# Altium PCB BASE.PcbDoc (part 1 of 5)
Units mil, origin at the board's own origin, x right, y up, seen from the top; angles counter-clockwise.
Board outline 4330.71 x 3937.01 mil, 6 copper layers (Top, GND1, SIG1, PWR, GND2, Bottom), stack 32.112 mil thick; 57 components, 250 nets, 665 pads, 350 vias.
Unrouted connection lines stored in the file: 2.
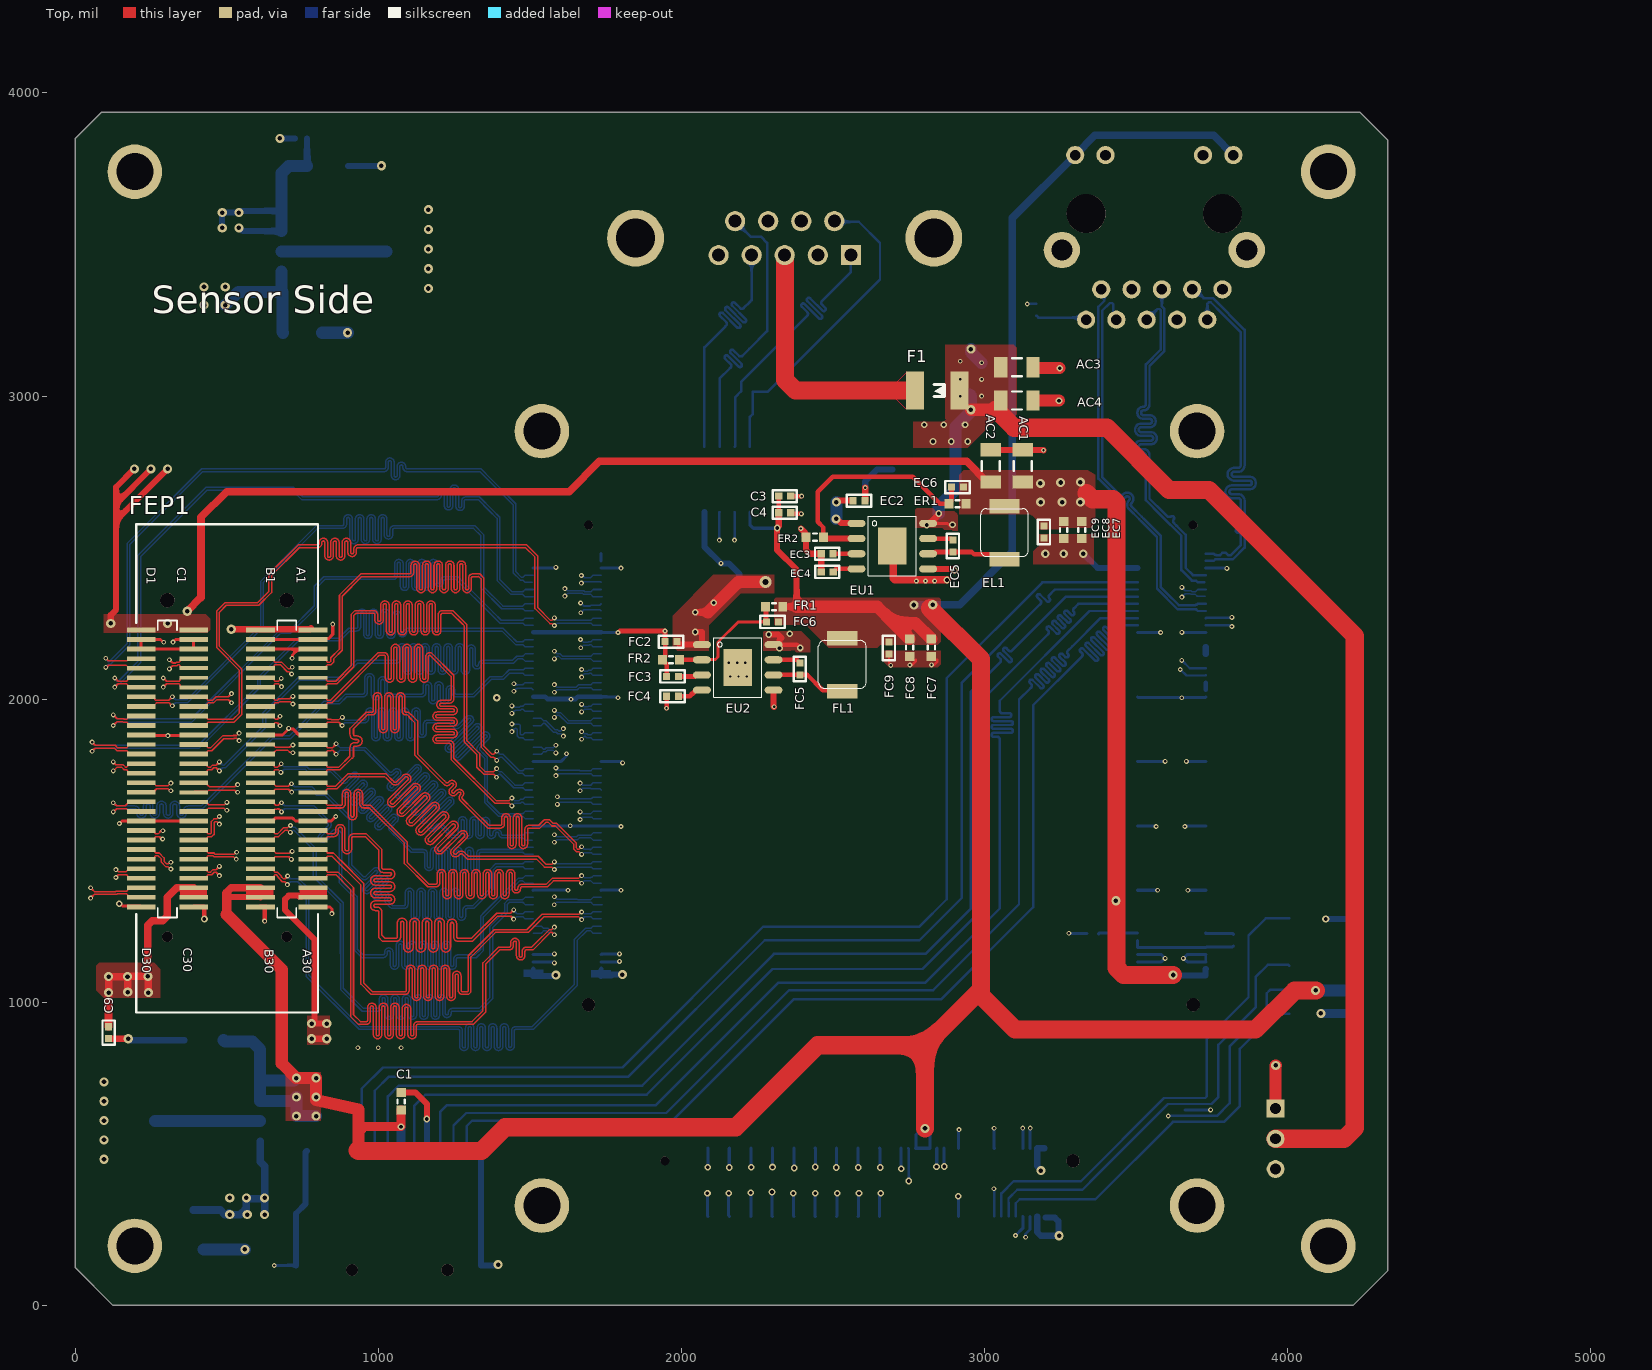
[diagram p0: Top view]
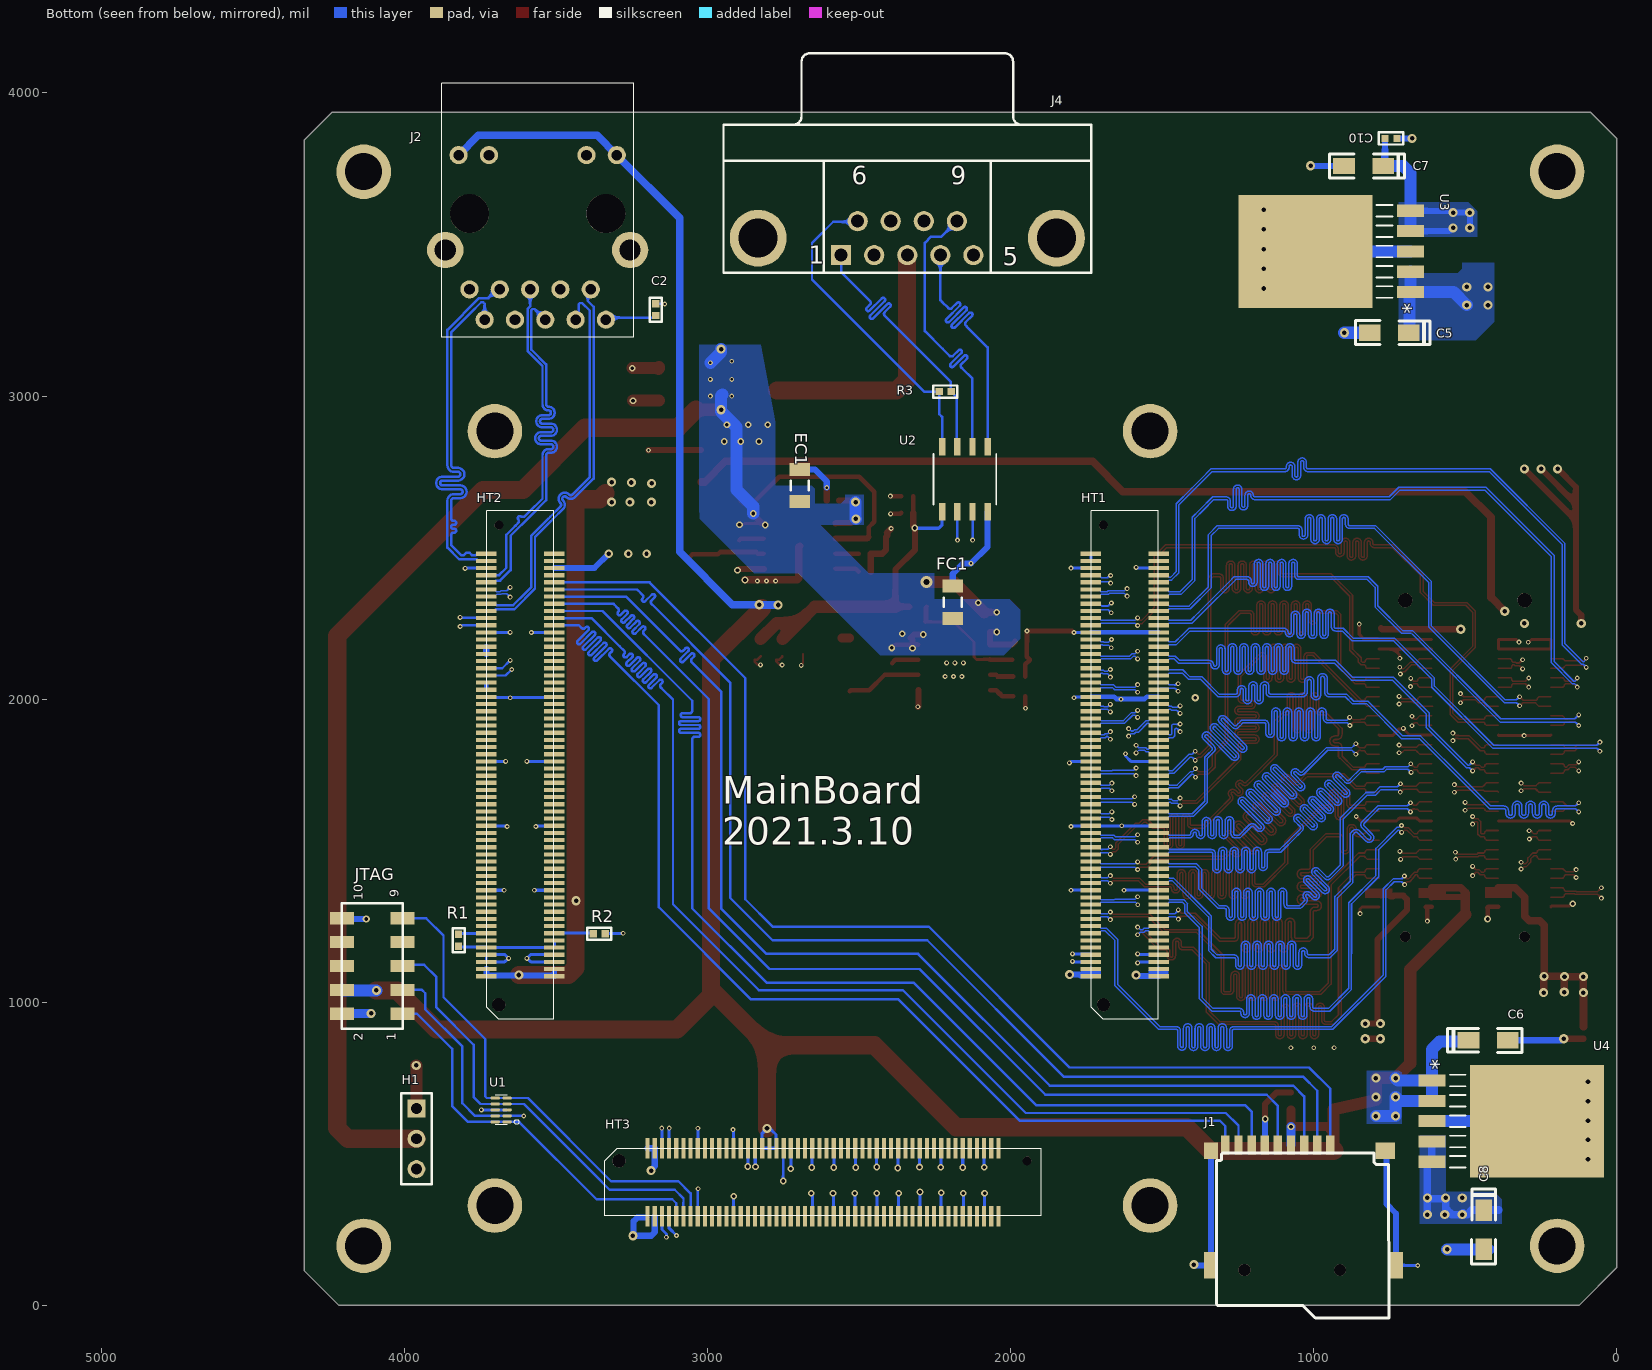
[diagram p1: Bottom view, seen from below]
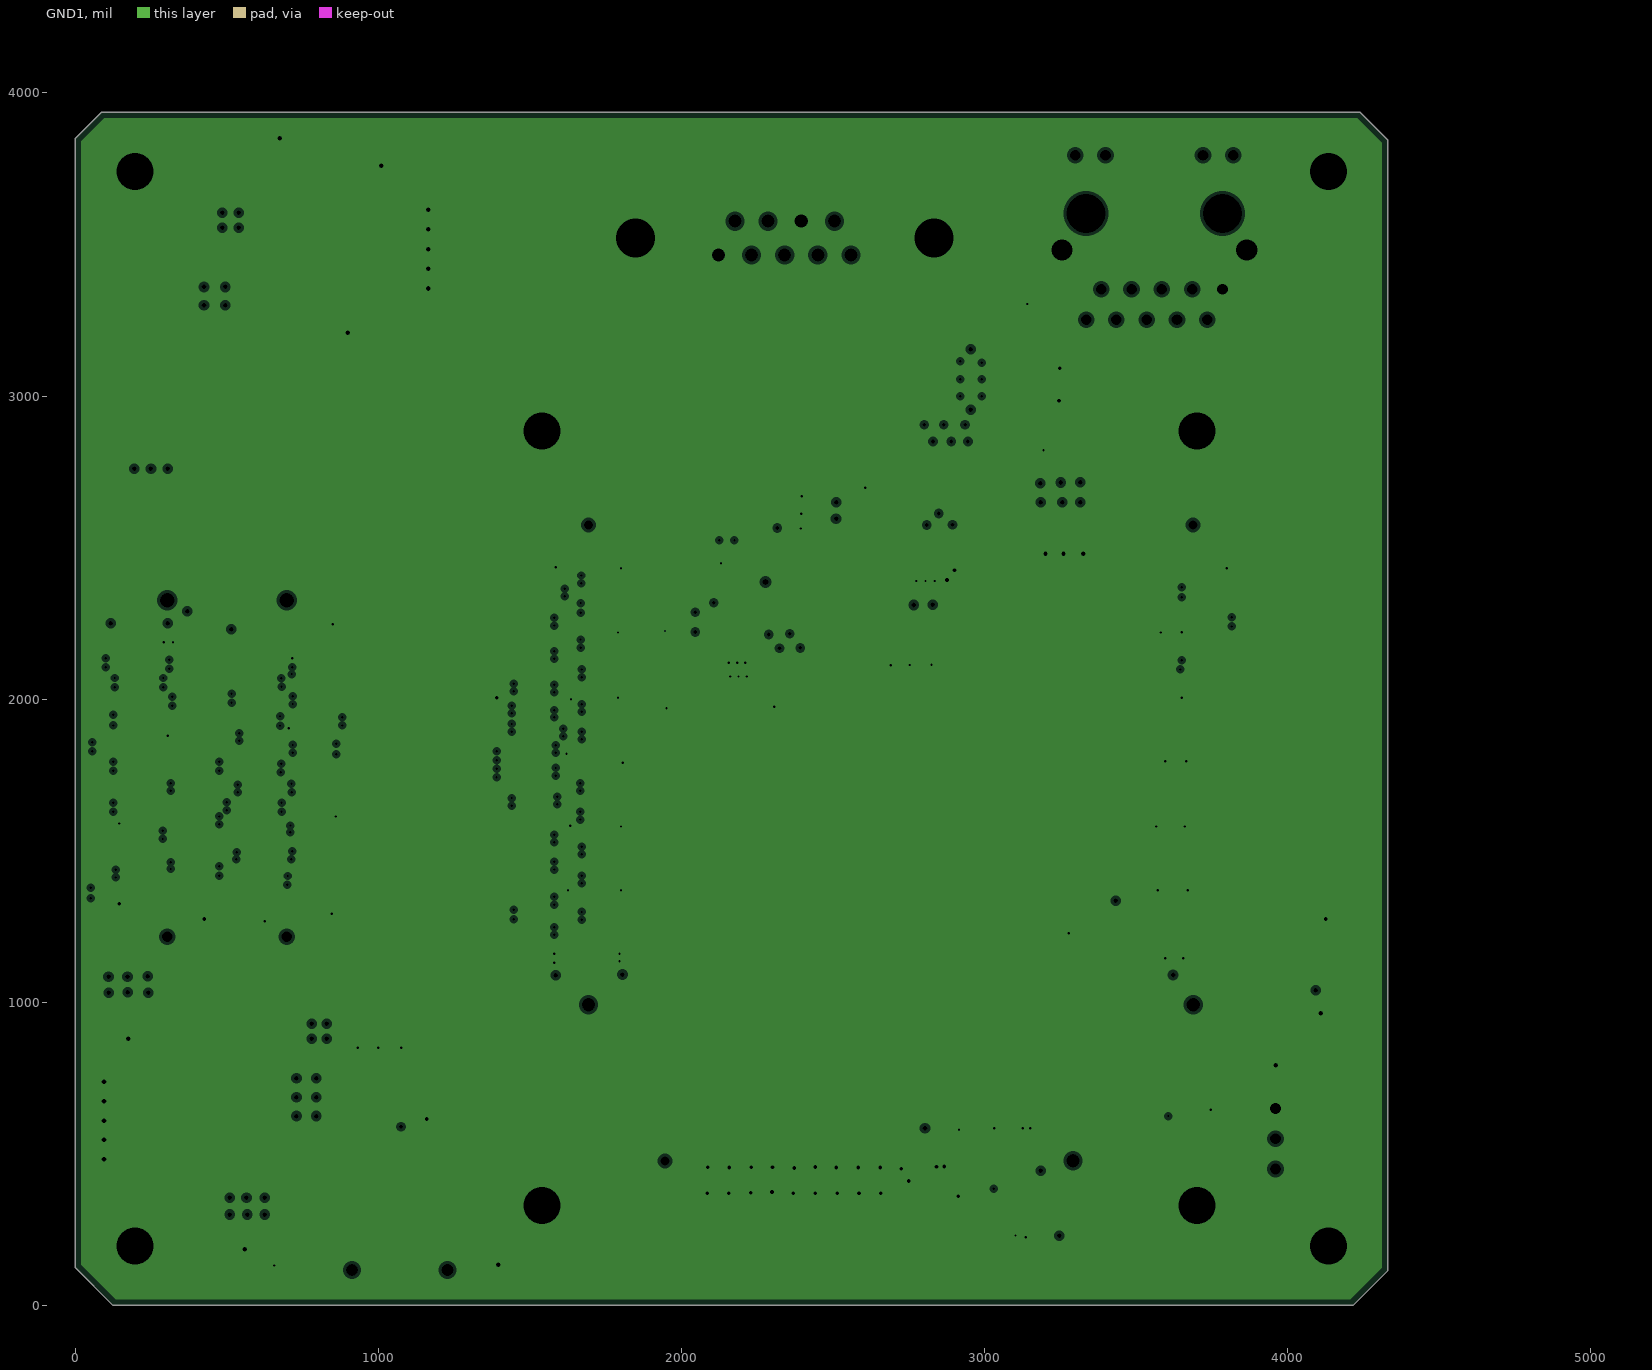
[diagram p2: GND1, clearances drawn from the general rule]
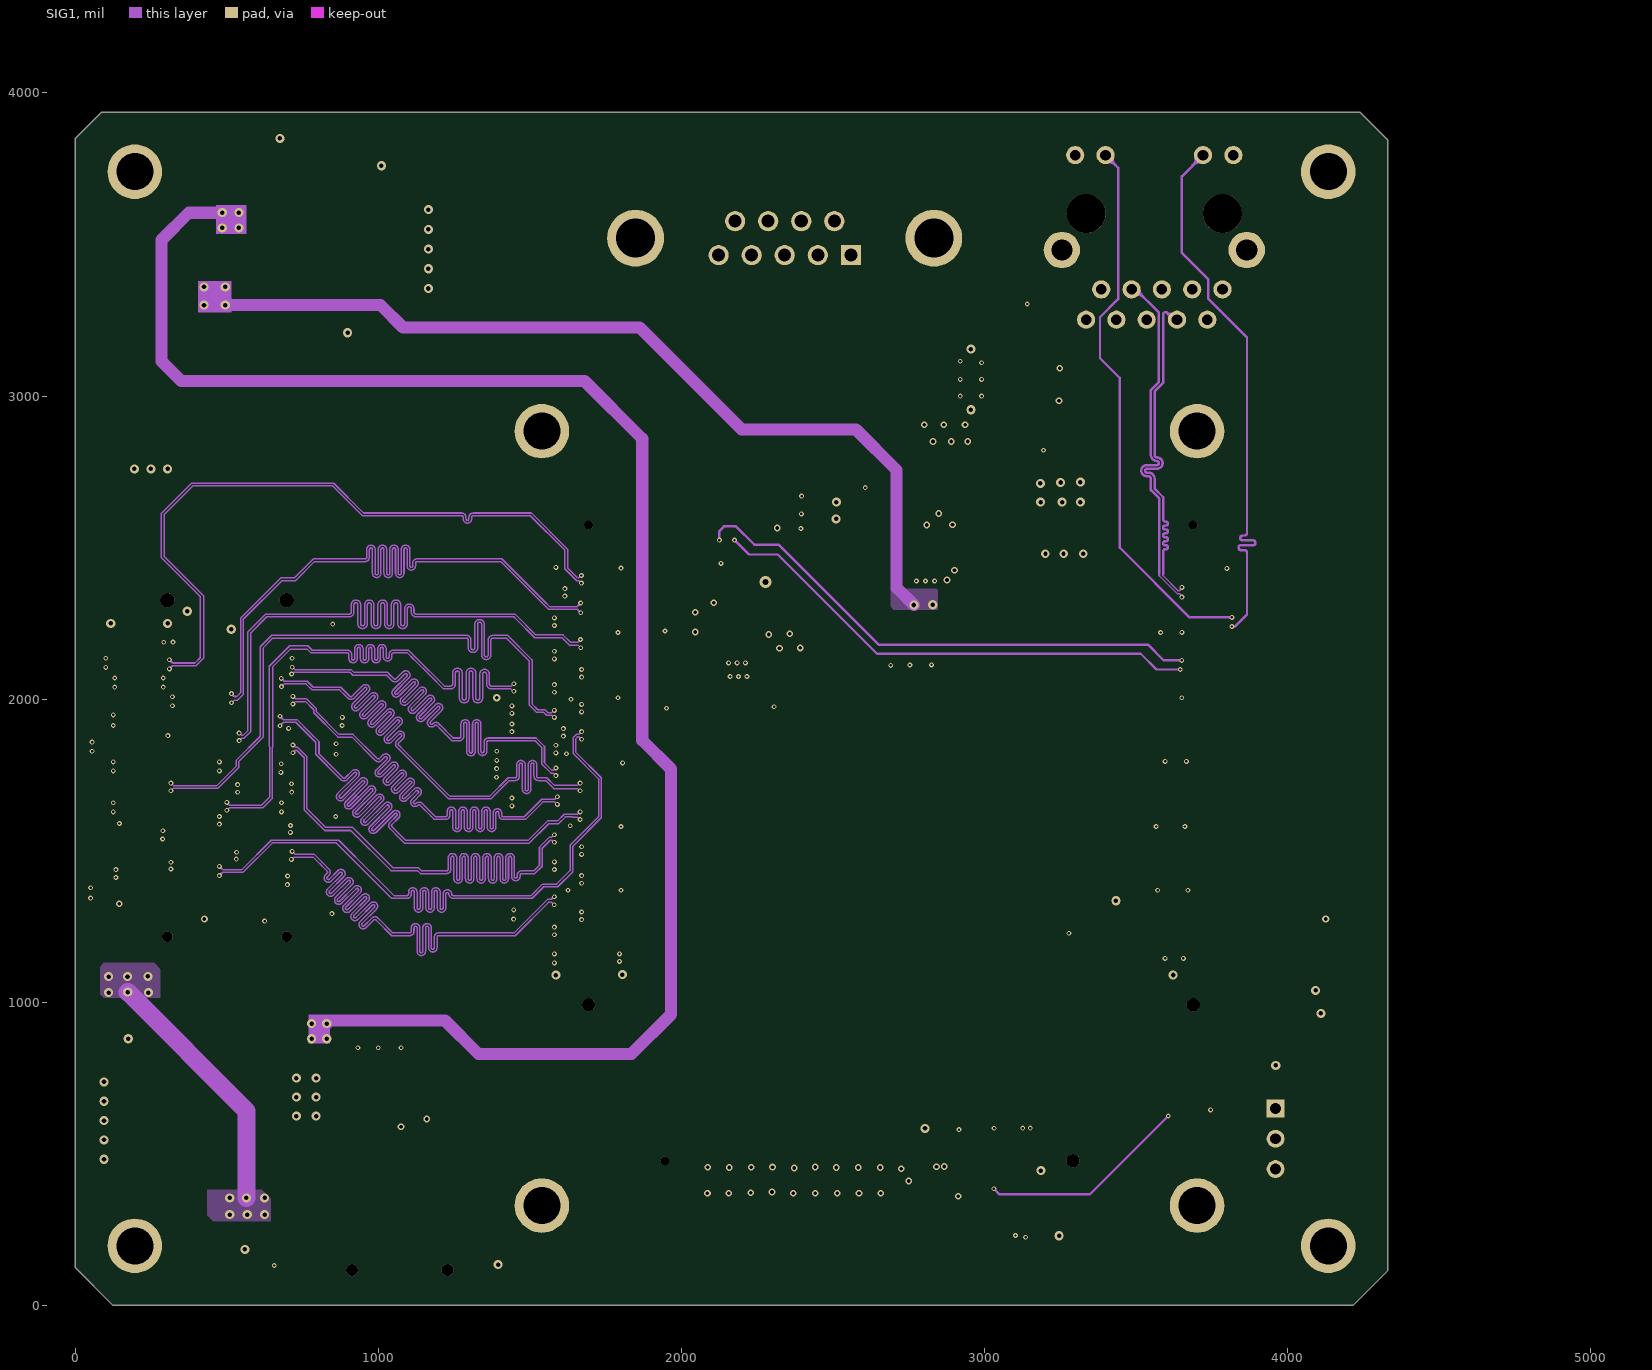
[diagram p3: SIG1]
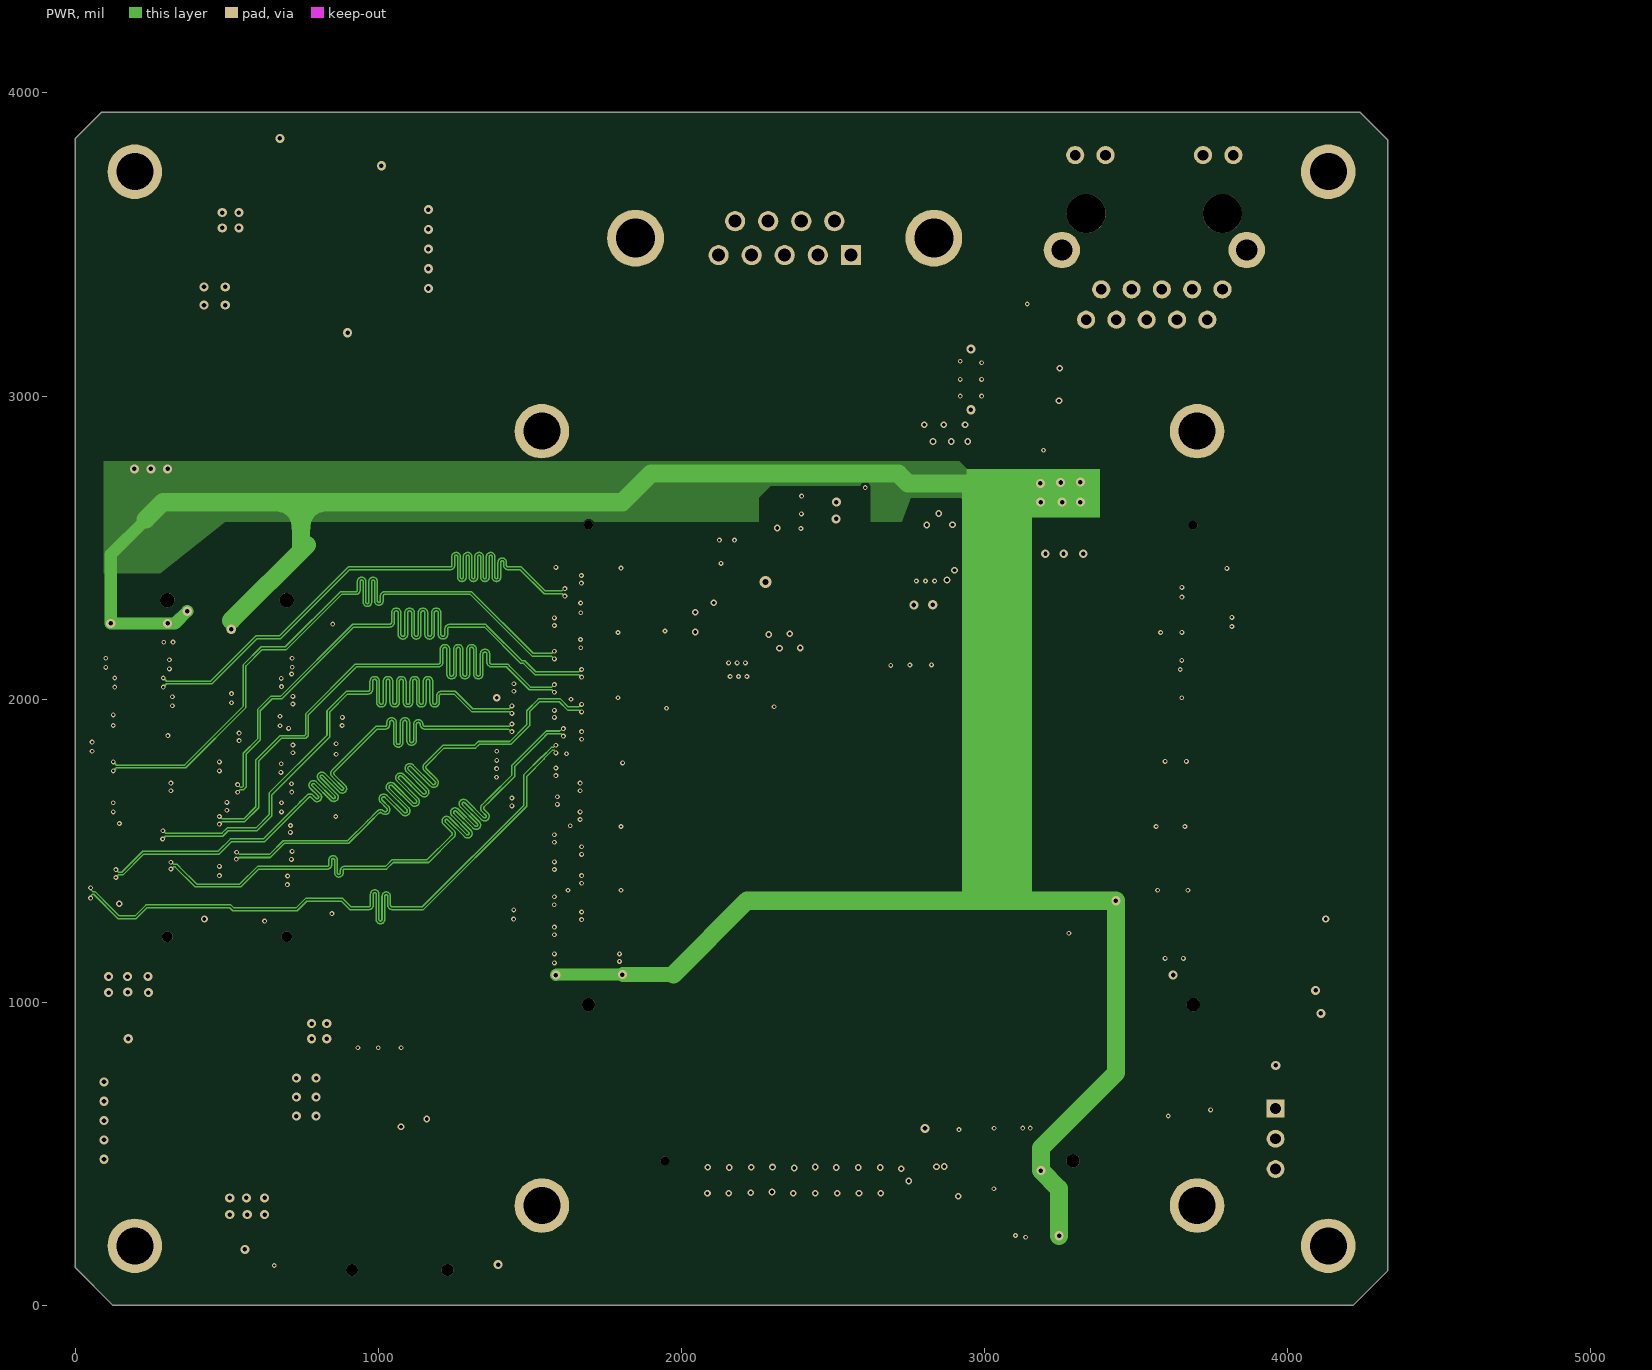
[diagram p4: PWR]
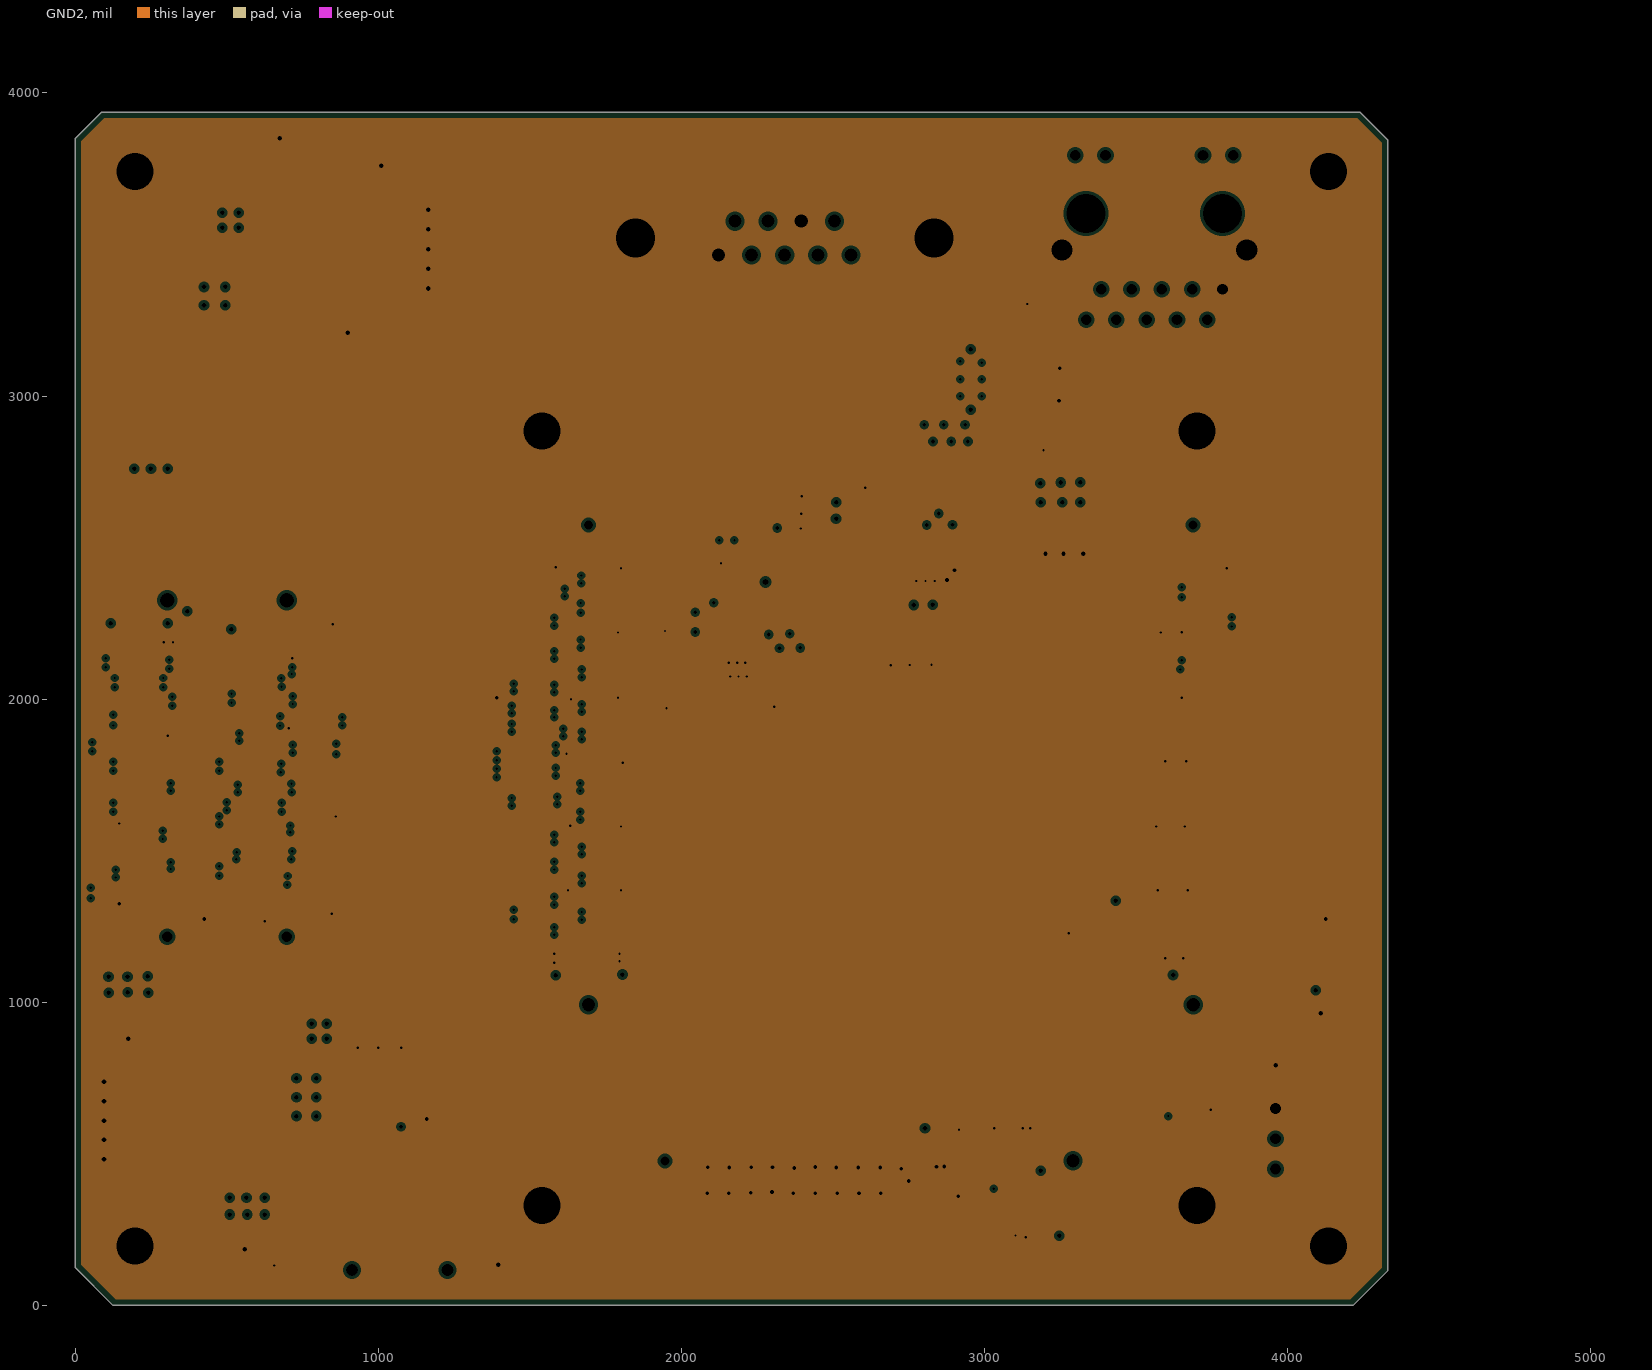
[diagram p5: GND2, clearances drawn from the general rule]

## Layer stack, top to bottom
Top Solder: solder mask 0.4, Solder Resist, Dk 3.5
Top: signal copper 1.4
Dielectric 2: prepreg 2.8, PP-006, Dk 4.1
GND1: plane copper 1.378, net GND
Dielectric 4: prepreg 2.8, PP-006, Dk 4.1
SIG1: signal copper 1.378
Dielectric 1: dielectric 12.6, FR-4, Dk 4.8
PWR: signal copper 1.378
Dielectric 5: prepreg 2.8, PP-006, Dk 4.1
GND2: plane copper 1.378, net GND
Dielectric 3: prepreg 2.8, PP-006, Dk 4.1
Bottom: signal copper 1.4
Bottom Solder: solder mask 0.4, Solder Resist, Dk 3.5

## Board outline
0,125 0,3849.7 87.31,3937.01 4237.99,3937.01 4330.71,3844.29 4330.71,115.71 4215,0 125,0

## Design rules (kind name [scope] priority, off if disabled: settings)
Clearance Clearance_1 [All vs InNet('5V_IN') And OnLayer('PWR')] p1: gap=6 ignorepadtopadclearanceinfootprint=FALSE except(0: Arc-Hole Track-Hole SMDPad-Hole THPad-Hole Via-Hole Fill-Hole Poly-Hole Region-Hole Text-Hole; 2: SMDPad-SMDPad SMDPad-THPad THPad-THPad; 4: Arc-Arc Arc-Track Track-Track; 10: Arc-Fill Arc-Poly Arc-Region Track-Fill Track-Poly Track-Region Via-Fill Via-Poly Via-Region Fill-Fill Fill-Poly Fill-Region Poly-Poly Poly-Region Region-Region)
Clearance Poly [All vs InNetClass('GND')] p2: gap=10 ignorepadtopadclearanceinfootprint=FALSE except(0: Arc-Hole Track-Hole SMDPad-Hole THPad-Hole Via-Hole Fill-Hole Poly-Hole Region-Hole Text-Hole; 2: SMDPad-SMDPad SMDPad-THPad THPad-THPad; 4: Arc-Arc Arc-Track Track-Track; 6: Arc-SMDPad Arc-THPad Arc-Via Arc-Text Track-SMDPad Track-THPad Track-Via Track-Text SMDPad-Via SMDPad-Text THPad-Via THPad-Text Via-Via Via-Text Fill-Text Poly-Text Region-Text Text-Text)
Clearance [All] p3: gap=6 ignorepadtopadclearanceinfootprint=FALSE except(0: Arc-Hole Track-Hole SMDPad-Hole THPad-Hole Via-Hole Fill-Hole Poly-Hole Region-Hole Text-Hole; 2: SMDPad-SMDPad SMDPad-THPad THPad-THPad; 4: Arc-Arc Arc-Track Track-Track)
DiffPairsRouting [All] p1: maxlimit=10 minlimit=4 mostfreqgap=4 toplayer_minwidth=5 toplayer_maxwidth=15 toplayer_prefwidth=5 midlayer1_minwidth=5 midlayer1_maxwidth=15 midlayer1_prefwidth=5 midlayer2_minwidth=5 midlayer2_maxwidth=15 midlayer2_prefwidth=5 bottomlayer_minwidth=5 bottomlayer_maxwidth=15 bottomlayer_prefwidth=5 maxuncoupledlength=500
HoleSize [All] p1: absolutevalues=TRUE maxlimit=150 minlimit=1 maxpercent=80.000 minpercent=20.000
HoleToHoleClearance [All] p1: gap=5 allowstackedmicrovias=TRUE
MatchedLengths [InDifferentialPairClass('All Differential Pairs')] p1: tolerance=5 checknetsindiffpair=TRUE checkdiffpairvsdiffpair=FALSE checkxsignals=FALSE checkothers=FALSE
MinimumSolderMaskSliver [All] p1: minsoldermaskwidth=1
ParallelSegment [All] p1: limit=200 gap=0
PlaneClearance [InNetClass('DIff')] p1: clearance=6
PlaneClearance PlaneClearance_1 [InNetClass('PWR')] p2: clearance=18
PlaneClearance PlaneClearance_2 [All] p3: clearance=10
PlaneConnect [All] p1: planeconnectstyle=Direct reliefexpansion=20 reliefentries=4 reliefconductorwidth=10 reliefairgap=10
PolygonConnect [All] p1: connectstyle=Direct reliefconductorwidth=10 reliefentries=4 polygonreliefangle="90 Angle" airgapwidth=10
RoutingVias [All] p1: holewidth=8 width=16 viastyle="Through Hole" minholewidth=6 minwidth=12 maxholewidth=40 maxwidth=50
SilkToSilkClearance [All] p1: silktosilkclearance=0
SilkToSolderMaskClearance [IsPad] p1: minsilkscreentomaskgap=0 clearancetoexposedcopper=TRUE
SolderMaskExpansion [All] p1: expansion=4 istentingtop=FALSE
Width [All] p1: maxlimit=60 minlimit=4 preferedwidth=6
22 further rules are at their usual default settings.

## Classes and differential pairs
net class UART: RXD+ RXD- TXD+ TXD-
net class SD: SD_CD_L TF_CLK TF_CMD TF_DAT0 TF_DAT1 TF_DAT2 TF_DAT3
net class GND: GND
net class PWR: 5V_IN DC12V_IN VCC3V3 VCC12V
net class DIff: B12_L1_N B12_L1_P B12_L2_N B12_L2_P B12_L3_N B12_L3_P B12_L4_N B12_L4_P B12_L5_N B12_L5_P B12_L6_N B12_L6_P B12_L7_N B12_L7_P B12_L8_N B12_L8_P B12_L9_N B12_L9_P B12_L10_N B12_L10_P B12_L11_N B12_L11_P B12_L12_N B12_L12_P B12_L13_N B12_L13_P B12_L14_N B12_L14_P B12_L15_N B12_L15_P B12_L16_N B12_L16_P B12_L17_N B12_L17_P B12_L18_N B12_L18_P B12_L19_N B12_L19_P B12_L20_N B12_L20_P B12_L21_N B12_L21_P B12_L22_N B12_L22_P B12_L23_N B12_L23_P B12_L24_N B12_L24_P B13_L1_N B13_L1_P B13_L2_N B13_L2_P B13_L3_N B13_L3_P B13_L4_N B13_L4_P B13_L5_N B13_L5_P B13_L6_N B13_L6_P B13_L7_N B13_L7_P B13_L8_N B13_L8_P B13_L9_N B13_L9_P B13_L10_N B13_L10_P B13_L11_N B13_L11_P B13_L12_N B13_L12_P B13_L13_N B13_L13_P B13_L14_N B13_L14_P B13_L15_N B13_L15_P B13_L16_N B13_L16_P B13_L17_N B13_L17_P B13_L18_N B13_L18_P B13_L19_N B13_L19_P B13_L20_N B13_L20_P B13_L21_N B13_L21_P B13_L22_N B13_L22_P B13_L23_N B13_L23_P B13_L24_N B13_L24_P
component class Power: AC1 AC2 AC3 AC4 C3 C4 C5 C6 C7 C8 C9 C10 EC1 EC2 EC3 EC4 EC5 EC6 EC7 EC8 EC9 EL1 ER1 ER2 EU1 EU2 F1 FC1 FC2 FC3 FC4 FC5 FC6 FC7 FC8 FC9 FL1 FR1 FR2 H1 J4 R3 U2 U3 U4
component class MainSocket: C1 C2 FEP1 HT1 HT2 HT3 J1 J2 JTAG R1 R2 U1
differential pair SFPB_TD: +SFPB_TD_P -SFPB_TD_N
differential pair SFPB_RD: +SFPB_RD_P -SFPB_RD_N
differential pair SFPA_TD: +SFPA_TD_P -SFPA_TD_N
differential pair SFPA_RD: +SFPA_RD_P -SFPA_RD_N
differential pair SATA2_TX: +SATA2_TX_P -SATA2_TX_N
differential pair SATA2_RX: +SATA2_RX_P -SATA2_RX_N
differential pair SATA1_TX: +SATA1_TX_P -SATA1_TX_N
differential pair SATA1_RX: +SATA1_RX_P -SATA1_RX_N
differential pair PCIE_TX3: +PCIE_TX3_P -PCIE_TX3_N
differential pair PCIE_TX2: +PCIE_TX2_P -PCIE_TX2_N
differential pair PCIE_TX1: +PCIE_TX1_P -PCIE_TX1_N
differential pair PCIE_TX0: +PCIE_TX0_P -PCIE_TX0_N
differential pair PCIE_RX3: +PCIE_RX3_P -PCIE_RX3_N
differential pair PCIE_RX2: +PCIE_RX2_P -PCIE_RX2_N
differential pair PCIE_RX1: +PCIE_RX1_P -PCIE_RX1_N
differential pair PCIE_RX0: +PCIE_RX0_P -PCIE_RX0_N
differential pair PCIE_CLK: +PCIE_CLK_P -PCIE_CLK_N
differential pair MGT112CLK0: +MGT112CLK0_P -MGT112CLK0_N
differential pair HDMI1_FPGA_D2: +HDMI1_FPGA_D2_P -HDMI1_FPGA_D2_N
differential pair HDMI1_FPGA_D1: +HDMI1_FPGA_D1_P -HDMI1_FPGA_D1_N
differential pair HDMI1_FPGA_D0: +HDMI1_FPGA_D0_P -HDMI1_FPGA_D0_N
differential pair HDMI1_FPGA_CLK: +HDMI1_FPGA_CLK_P -HDMI1_FPGA_CLK_N
differential pair ETH-TD3: +ETH-TD3_P -ETH-TD3_N
differential pair ETH-TD2: +ETH-TD2_P -ETH-TD2_N
differential pair ETH-TD1: +ETH-TD1_P -ETH-TD1_N
differential pair ETH-TD0: +ETH-TD0_P -ETH-TD0_N
differential pair CORE_UART: +CORE_UART_P -CORE_UART_N
differential pair B13_L24: +B13_L24_P -B13_L24_N
differential pair B13_L23: +B13_L23_P -B13_L23_N
differential pair B13_L22: +B13_L22_P -B13_L22_N
differential pair B13_L21: +B13_L21_P -B13_L21_N
differential pair B13_L20: +B13_L20_P -B13_L20_N
differential pair B13_L19: +B13_L19_P -B13_L19_N
differential pair B13_L18: +B13_L18_P -B13_L18_N
differential pair B13_L17: +B13_L17_P -B13_L17_N
differential pair B13_L16: +B13_L16_P -B13_L16_N
differential pair B13_L15: +B13_L15_P -B13_L15_N
differential pair B13_L14: +B13_L14_P -B13_L14_N
differential pair B13_L13: +B13_L13_P -B13_L13_N
differential pair B13_L12: +B13_L12_P -B13_L12_N
differential pair B13_L11: +B13_L11_P -B13_L11_N
differential pair B13_L10: +B13_L10_P -B13_L10_N
differential pair B13_L9: +B13_L9_P -B13_L9_N
differential pair B13_L8: +B13_L8_P -B13_L8_N
differential pair B13_L7: +B13_L7_P -B13_L7_N
differential pair B13_L6: +B13_L6_P -B13_L6_N
differential pair B13_L5: +B13_L5_P -B13_L5_N
differential pair B13_L4: +B13_L4_P -B13_L4_N
differential pair B13_L3: +B13_L3_P -B13_L3_N
differential pair B13_L2: +B13_L2_P -B13_L2_N
differential pair B13_L1: +B13_L1_P -B13_L1_N
differential pair B12_L24: +B12_L24_P -B12_L24_N
differential pair B12_L23: +B12_L23_P -B12_L23_N
differential pair B12_L22: +B12_L22_P -B12_L22_N
differential pair B12_L21: +B12_L21_P -B12_L21_N
differential pair B12_L20: +B12_L20_P -B12_L20_N
differential pair B12_L19: +B12_L19_P -B12_L19_N
differential pair B12_L18: +B12_L18_P -B12_L18_N
differential pair B12_L17: +B12_L17_P -B12_L17_N
differential pair B12_L16: +B12_L16_P -B12_L16_N
differential pair B12_L15: +B12_L15_P -B12_L15_N
differential pair B12_L14: +B12_L14_P -B12_L14_N
differential pair B12_L13: +B12_L13_P -B12_L13_N
differential pair B12_L12: +B12_L12_P -B12_L12_N
differential pair B12_L11: +B12_L11_P -B12_L11_N
differential pair B12_L10: +B12_L10_P -B12_L10_N
differential pair B12_L9: +B12_L9_P -B12_L9_N
differential pair B12_L8: +B12_L8_P -B12_L8_N
differential pair B12_L7: +B12_L7_P -B12_L7_N
differential pair B12_L6: +B12_L6_P -B12_L6_N
differential pair B12_L5: +B12_L5_P -B12_L5_N
differential pair B12_L4: +B12_L4_P -B12_L4_N
differential pair B12_L3: +B12_L3_P -B12_L3_N
differential pair B12_L2: +B12_L2_P -B12_L2_N
differential pair B12_L1: +B12_L1_P -B12_L1_N

## Components (designator, comment, footprint, x,y, rotation, side; value= is the part's Value field where it differs from the comment)
AC1 "100uf/6V3" CAP1206 3125.71,2769.68 r270 top
AC2 "100uf/6V3" CAP1206 3020.71,2769.68 r270 top value=10nF
AC3 "22uf/16V" CAP1206 3106.46,3095.47 r180 top value=10nF
AC4 "22uf/16V" CAP1206 3106.46,2985.47 r180 top value=10nF
C1 "10uf/6V3" CAP0603 1075,673.54 r90 top value=4.7uF
C2 "0.1uf" CAP0402 3170.71,3285 r270 bottom
C3 "2.2uf" CAP0402 2340.71,2670 r0 top
C4 "100nf" CAP0402 2340.71,2615 r0 top
C5 "10uF" CASE-A_3216 755,3210 r180 bottom
C6 "10uF" CASE-A_3216 420,874 r0 bottom
C7 "10uF" CASE-A_3216 840,3760 r180 bottom
C8 "10uF" CASE-A_3216 440,245 r90 bottom
C9 "1uF" CAP0402 110,900 r90 top
C10 "1uF" CAP0402 745,3850 r0 bottom
EC1 "22uf/16V" CAP1206 2695.71,2705 r270 bottom
EC2 "0.1uf" CAP0402 2585.71,2655 r180 top
EC3 "0.1uf" CAP0402 2480.71,2480 r0 top
EC4 "3.3nf" CAP0402 2481.02,2420 r0 top
EC5 "0.1uf" CAP0402 2895.71,2505.31 r270 top
EC6 "20pf" CAP0402 2910.71,2700 r0 top
EC7 "47uf" CAP0603 3320.71,2558.11 r90 top
EC8 "47uf" CAP0603 3260.71,2558.11 r90 top
EC9 "100nf" CAP0402 3195.71,2551.65 r90 top
EL1 "2.2uh" L4X4X2 3065.71,2550 r90 top
ER1 "124K1%" CAP0603 2910.71,2645 r180 top value=4.7K
ER2 "22.1K1%" CAP0603 2440,2535 r0 top value=4.7K
EU1 "TPS54627" SOP8_EP_127P4X5X1_5 2695.71,2505 r0 top
EU2 "TPS54627" SOP8_EP_127P4X5X1_5 2185.71,2105 r0 top
F1 "FUSE" 1206 2917.71,3018.15 r180 top
FC1 "22uf/16V" CAP1206 2190.71,2320 r270 bottom
FC2 "0.1uf" CAP0402 1965.71,2190 r0 top
FC3 "0.1uf" CAP0402 1970.71,2075 r0 top
FC4 "3.3nf" CAP0402 1970.71,2010 r0 top
FC5 "0.1uf" CAP0402 2390.71,2099.69 r270 top
FC6 "20pf" CAP0402 2300.39,2255 r0 top
FC7 "47uf" CAP0603 2824.61,2170 r90 top
FC8 "47uf" CAP0603 2752.52,2170 r90 top
FC9 "100nf" CAP0402 2684.61,2168.86 r90 top
FEP1 "FEP" FEP-X2 500.94,2464.57 r0 top locked
FL1 "2.2uh" L4X4X2 2530.71,2115 r90 top
FR1 "73.2K1%" CAP0603 2305.71,2305 r180 top value=4.7K
FR2 "22.1K1%" CAP0603 1965.71,2130 r0 top value=4.7K
H1 "Header 3" HDR1X3 3960,650 r270 bottom
HT1 "FX8-120S-SV92" FX8-120S-SV92 2206.89,2197.17 r0 bottom locked
HT2 "FX8-120S-SV92" FX8-120S-SV92 4201.38,2197.17 r0 bottom locked
HT3 "FX8-100S-SV92" FX8-100S-SV92 3166.54,460.43 r90 bottom locked
J1 "SDK" TF_K 945,530 r270 bottom
J2 "HY911130A" HY911130A 3559.88,3602.09 r0 bottom
J4 "D Connector 9" DSUB1.385-2H9 2340.71,3895 r180 bottom
JTAG "JTAG" HEADER5X2X2.0T 4205.71,962.52 r90 bottom
R1 "80.6R" RES0402 3820.71,1205 r270 bottom value=10K
R2 "80.6R" RES0402 3356.95,1226.56 r180 bottom value=10K
R3 "120R" RES0402 2215.39,3015 r180 bottom value=10K
U1 "RCLAMP0524P" SLP2510P8_10 3680.71,645 r0 bottom
U2 "MAX3490CSA+" 21-0041B_8_MXM 2150.71,2725 r90 bottom
U3 "LT1764EQ-2.5#TRPBF" DDPAK-5_Q 1027.22,3477.23 r90 bottom
U4 "LT1764EQ-1.8#TRPBF" DDPAK-5_Q 263.5,608 r270 bottom

## Footprints (in the part's own frame and the unit in brackets; to place one, negate y for a bottom-side part, rotate by r counter-clockwise, add the part's x,y. Pads: shape width x height; smd on the part's side, far side on the other; paste and mask are expansions set on the pad)
21-0041B_8_MXM [mil]
  rect 57.5x21 smd paste+0 mask+0: 1(-107.25,75) 2(-107.25,25) 3(-107.25,-25) 4(-107.25,-75) 5(107.25,-75) 6(107.25,-25) 7(107.25,25) 8(107.25,75)
  silkscreen extent -84,-104 84,104, body extent 0,0 10,10, height 10
1206 [mil]
  rect 60x125.98 smd: 1(0,0) 2(147,0)
  silkscreen extent 49,-20 85,20, body extent -34,-34 168,34, height 52
CAP0402 [mm]
  rect 0.6x0.6 smd: 1(-0.5,0) 2(0.5,0)
  silkscreen extent -1.02,-0.51 1.02,0.51, body extent -0.55,-0.3 0.55,0.3, height 0.6
CAP0603 [mm]
  rect 0.75x0.8 smd: 1(-0.725,0) 2(0.725,0)
  silkscreen extent -0.15,-0.3 0.15,0.3, body extent -0.86,-0.46 0.86,0.46, height 0.92
CAP1206 [mm]
  rect 1.1x1.7 smd: 1(-1.35,0) 2(1.35,0)
  silkscreen extent -0.4,-0.75 0.4,0.75, body extent -1.7,-0.9 1.7,0.9, height 1.3
CASE-A_3216 [mil]
  rect 71.5x53.5 smd: 1(69,-1) 2(-60,-1)
  silkscreen extent -107,-40 139,39
DDPAK-5_Q [mil]
  rect 40x90 smd: 1(-134,-346.5) 2(-67,-346.5) 3(0,-346.5) 4(67,-346.5) 5(134,-346.5)
  rect 372x443 smd: 6(0,0)
  silkscreen extent -153,-288 153,-235, body extent 0,0 10,10, height 10
DSUB1.385-2H9 [mm] "Connector; D Subminiature; 9 Position; Right Angle; Pitch 1.385 mm"
  rect 1.69x1.69 hole 1.09: 1(-5.54,-10.92)
  round 1.69 hole 1.09: 2(-2.77,-10.92) 3(0,-10.92) 4(2.77,-10.92) 5(5.54,-10.92) 6(-4.155,-8.08) 7(-1.385,-8.08) 8(1.385,-8.08) 9(4.155,-8.08)
  round 4.76 hole 3.26: 10(-12.495,-9.5) 11(12.495,-9.5)
  silkscreen extent -15.4,-12.4 15.4,6
FEP-X2 [mm]
  round 0.889 hole 0.889: 0(-5,-31.7) 0(5,-31.7)
  round 1.2 hole 1.2: 0(-5,-3.5) 0(5,-3.5)
  rect 2.4x0.4 smd: A1(7.2,-6) A2(7.2,-6.8) A3(7.2,-7.6) A4(7.2,-8.4) A8(7.2,-11.6) A9(7.2,-12.4) A10(7.2,-13.2) A11(7.2,-14) A12(7.2,-14.8) A13(7.2,-15.6) A14(7.2,-16.4) A15(7.2,-17.2) A16(7.2,-18) A17(7.2,-18.8) A20(7.2,-21.2) A21(7.2,-22) A22(7.2,-22.8) A23(7.2,-23.6) A24(7.2,-24.4) A25(7.2,-25.2) A26(7.2,-26) A27(7.2,-26.8) A28(7.2,-27.6) A29(7.2,-28.4) A30(7.2,-29.2) B1(2.8,-6) B2(2.8,-6.8) B3(2.8,-7.6) B4(2.8,-8.4) B5(2.8,-9.2) B6(2.8,-10) B7(2.8,-10.8) B8(2.8,-11.6) B9(2.8,-12.4) B10(2.8,-13.2) B11(2.8,-14) B12(2.8,-14.8) B14(2.8,-16.4) B15(2.8,-17.2) B16(2.8,-18) B17(2.8,-18.8) B18(2.8,-19.6) B19(2.8,-20.4) B20(2.8,-21.2) B21(2.8,-22) B22(2.8,-22.8) B23(2.8,-23.6) B24(2.8,-24.4) B25(2.8,-25.2) B26(2.8,-26) B27(2.8,-26.8) B28(2.8,-27.6) B29(2.8,-28.4) B30(2.8,-29.2) C1(-2.8,-6) C2(-2.8,-6.8) C3(-2.8,-7.6) C4(-2.8,-8.4) C8(-2.8,-11.6) C9(-2.8,-12.4) C10(-2.8,-13.2) C11(-2.8,-14) C12(-2.8,-14.8) C13(-2.8,-15.6) C14(-2.8,-16.4) C15(-2.8,-17.2) C16(-2.8,-18) C17(-2.8,-18.8) C20(-2.8,-21.2) C21(-2.8,-22) C22(-2.8,-22.8) C23(-2.8,-23.6) C24(-2.8,-24.4) C25(-2.8,-25.2) C26(-2.8,-26) C27(-2.8,-26.8) C28(-2.8,-27.6) C29(-2.8,-28.4) C30(-2.8,-29.2) D1(-7.2,-6) D2(-7.2,-6.8) D3(-7.2,-7.6) D4(-7.2,-8.4) D5(-7.2,-9.2) D6(-7.2,-10) D7(-7.2,-10.8) D8(-7.2,-11.6) D9(-7.2,-12.4) D10(-7.2,-13.2) D11(-7.2,-14) D12(-7.2,-14.8) D14(-7.2,-16.4) D15(-7.2,-17.2) D16(-7.2,-18) D17(-7.2,-18.8) D18(-7.2,-19.6) D19(-7.2,-20.4) D20(-7.2,-21.2) D21(-7.2,-22) D22(-7.2,-22.8) D23(-7.2,-23.6) D24(-7.2,-24.4) D25(-7.2,-25.2) D26(-7.2,-26) D27(-7.2,-26.8) D28(-7.2,-27.6) D29(-7.2,-28.4) D30(-7.2,-29.2)
  rect 2.4x0.33 smd: A5(7.2,-9.2) A6(7.2,-10) A7(7.2,-10.8) A18(7.2,-19.6) A19(7.2,-20.4) B13(2.8,-15.6) C5(-2.8,-9.2) C6(-2.8,-10) C7(-2.8,-10.8) C18(-2.8,-19.6) C19(-2.8,-20.4) D13(-7.2,-15.6)
  silkscreen extent -7.62,-38.05 7.62,2.85
FX8-100S-SV92 [mm]
  rect 1.7x0.35 smd: A1(-4.221,0.782) A2(-4.221,0.182) A3(-4.221,-0.418) A4(-4.221,-1.018) A5(-4.221,-1.618) A6(-4.221,-2.218) A7(-4.221,-2.818) A8(-4.221,-3.418) A9(-4.221,-4.018) A10(-4.221,-4.618) A11(-4.221,-5.218) A12(-4.221,-5.818) A13(-4.221,-6.418) A14(-4.221,-7.018) A15(-4.221,-7.618) A16(-4.221,-8.218) A17(-4.221,-8.818) A18(-4.221,-9.418) A19(-4.221,-10.018) A20(-4.221,-10.618) A21(-4.221,-11.218) A22(-4.221,-11.818) A23(-4.221,-12.418) A24(-4.221,-13.018) A25(-4.221,-13.618) A26(-4.221,-14.218) A27(-4.221,-14.818) A28(-4.221,-15.418) A29(-4.221,-16.018) A30(-4.221,-16.618) A31(-4.221,-17.218) A32(-4.221,-17.818) A33(-4.221,-18.418) A34(-4.221,-19.018) A35(-4.221,-19.618) A36(-4.221,-20.218) A37(-4.221,-20.818) A38(-4.221,-21.418) A39(-4.221,-22.018) A40(-4.221,-22.618) A41(-4.221,-23.218) A42(-4.221,-23.818) A43(-4.221,-24.418) A44(-4.221,-25.018) A45(-4.221,-25.618) A46(-4.221,-26.218) A47(-4.221,-26.818) A48(-4.221,-27.418) A49(-4.221,-28.018) A50(-4.221,-28.618) B1(1.479,0.782) B2(1.479,0.182) B3(1.479,-0.418) B4(1.479,-1.018) B5(1.479,-1.618) B6(1.479,-2.218) B7(1.479,-2.818) B8(1.479,-3.418) B9(1.479,-4.018) B10(1.479,-4.618) B11(1.479,-5.218) B12(1.479,-5.818) B13(1.479,-6.418) B14(1.479,-7.018) B15(1.479,-7.618) B16(1.479,-8.218) B17(1.479,-8.818) B18(1.479,-9.418) B19(1.479,-10.018) B20(1.479,-10.618) B21(1.479,-11.218) B22(1.479,-11.818) B23(1.479,-12.418) B24(1.479,-13.018) B25(1.479,-13.618) B26(1.479,-14.218) B27(1.479,-14.818) B28(1.479,-15.418) B29(1.479,-16.018) B30(1.479,-16.618) B31(1.479,-17.218) B32(1.479,-17.818) B33(1.479,-18.418) B34(1.479,-19.018) B35(1.479,-19.618) B36(1.479,-20.218) B37(1.479,-20.818) B38(1.479,-21.418) B39(1.479,-22.018) B40(1.479,-22.618) B41(1.479,-23.218) B42(1.479,-23.818) B43(1.479,-24.418) B44(1.479,-25.018) B45(1.479,-25.618) B46(1.479,-26.218) B47(1.479,-26.818) B48(1.479,-27.418) B49(1.479,-28.018) B50(1.479,-28.618)
  round 1.092 hole 1.1: C1(0.429,3.182)
  round 0.711 hole 0.75: C2(0.429,-31.018)
  silkscreen extent -4.17,-32.22 1.43,4.38, body extent -5.12,-32.32 2.38,4.48, height 3.81
FX8-120S-SV92 [mm]
  rect 1.7x0.35 smd: A1(-17.683,28.214) A2(-17.683,27.614) A3(-17.683,27.014) A4(-17.683,26.414) A5(-17.683,25.814) A6(-17.683,25.214) A7(-17.683,24.614) A8(-17.683,24.014) A9(-17.683,23.414) A10(-17.683,22.814) A11(-17.683,22.214) A12(-17.683,21.614) A13(-17.683,21.014) A14(-17.683,20.414) A15(-17.683,19.814) A16(-17.683,19.214) A17(-17.683,18.614) A18(-17.683,18.014) A19(-17.683,17.414) A20(-17.683,16.814) A21(-17.683,16.214) A22(-17.683,15.614) A23(-17.683,15.014) A24(-17.683,14.414) A25(-17.683,13.814) A26(-17.683,13.214) A27(-17.683,12.614) A28(-17.683,12.014) A29(-17.683,11.414) A30(-17.683,10.814) A31(-17.683,10.214) A32(-17.683,9.614) A33(-17.683,9.014) A34(-17.683,8.414) A35(-17.683,7.814) A36(-17.683,7.214) A37(-17.683,6.614) A38(-17.683,6.014) A39(-17.683,5.414) A40(-17.683,4.814) A41(-17.683,4.214) A42(-17.683,3.614) A43(-17.683,3.014) A44(-17.683,2.414) A45(-17.683,1.814) A46(-17.683,1.214) A47(-17.683,0.614) A48(-17.683,0.014) A49(-17.683,-0.586) A50(-17.683,-1.186) A51(-17.683,-1.786) A52(-17.683,-2.386) A53(-17.683,-2.986) A54(-17.683,-3.586) A55(-17.683,-4.186) A56(-17.683,-4.786) A57(-17.683,-5.386) A58(-17.683,-5.986) A59(-17.683,-6.586) A60(-17.683,-7.186) B1(-11.983,28.214) B2(-11.983,27.614) B3(-11.983,27.014) B4(-11.983,26.414) B5(-11.983,25.814) B6(-11.983,25.214) B7(-11.983,24.614) B8(-11.983,24.014) B9(-11.983,23.414) B10(-11.983,22.814) B11(-11.983,22.214) B12(-11.983,21.614) B13(-11.983,21.014) B14(-11.983,20.414) B15(-11.983,19.814) B16(-11.983,19.214) B17(-11.983,18.614) B18(-11.983,18.014) B19(-11.983,17.414) B20(-11.983,16.814) B21(-11.983,16.214) B22(-11.983,15.614) B23(-11.983,15.014) B24(-11.983,14.414) B25(-11.983,13.814) B26(-11.983,13.214) B27(-11.983,12.614) B28(-11.983,12.014) B29(-11.983,11.414) B30(-11.983,10.814) B31(-11.983,10.214) B32(-11.983,9.614) B33(-11.983,9.014) B34(-11.983,8.414) B35(-11.983,7.814) B36(-11.983,7.214) B37(-11.983,6.614) B38(-11.983,6.014) B39(-11.983,5.414) B40(-11.983,4.814) B41(-11.983,4.214) B42(-11.983,3.614) B43(-11.983,3.014) B44(-11.983,2.414) B45(-11.983,1.814) B46(-11.983,1.214) B47(-11.983,0.614) B48(-11.983,0.014) B49(-11.983,-0.586) B50(-11.983,-1.186) B51(-11.983,-1.786) B52(-11.983,-2.386) B53(-11.983,-2.986) B54(-11.983,-3.586) B55(-11.983,-4.186) B56(-11.983,-4.786) B57(-11.983,-5.386) B58(-11.983,-5.986) B59(-11.983,-6.586) B60(-11.983,-7.186)
  round 1.092 hole 1.1: C1(-13.033,30.614)
  round 0.711 hole 0.75: C2(-13.033,-9.586)
  silkscreen extent -17.63,-10.79 -12.03,31.81, body extent -18.55,-10.83 -11.05,31.88, height 3.81
HDR1X3 [mm]
  rect 1.5x1.5 hole 0.9: 1(0,0)
  round 1.5 hole 0.9: 2(2.54,0) 3(5.08,0)
  silkscreen extent -1.27,-1.27 6.35,1.27
HEADER5X2X2.0T [mil]
  rect 40x80 smd: 1(0,-200) 2(0,0) 3(78.74,-200) 4(78.74,0) 5(157.48,-200) 6(157.48,0) 7(236.22,-200) 8(236.22,0) 9(314.96,-200) 10(314.96,0)
  silkscreen extent -50,-200 364,0
HY911130A [mil]
  round 60 hole 35: 1(-225,350) 2(-175,250) 3(-125,350) 4(-75,250) 5(-25,350) 6(25,250) 7(75,350) 8(125,250) 9(175,350) 10(225,250) 11(-260.83,-192.91) 12(-160.83,-192.91) 13(160.83,-192.91) 14(260.83,-192.91)
  round 120 hole 70: 15(-304.92,120.08) 16(304.92,120.08)
  round 128 hole 128: " "(-225,0) " "(225,0)
  silkscreen extent -317,-430 317,409, body extent -317,-430 317,409, height 150
L4X4X2 [mm]
  rect 1.2x2.54 smd: 1(-2.25,0) 2(2.2,0)
  silkscreen extent -2,-2 2,2, body extent -3,-2.1 3,2.1, height 3.81
RES0402 [mm]
  rect 0.6x0.6 smd: 1(-0.5,0) 2(0.5,0)
  silkscreen extent -1.02,-0.51 1.02,0.51, body extent -0.55,-0.3 0.55,0.3, height 0.6
SLP2510P8_10 [mm]
  oval 0.8x0.25 smd: 1(-0.5,1) 2(-0.5,0.5) 3(-0.5,0) 4(-0.5,-0.5) 5(-0.5,-1) 6(0.5,-1) 7(0.5,-0.5) 8(0.5,0) 9(0.5,0.5) 10(0.5,1)
  silkscreen extent -1.5,-1.25 0.5,1.25, body extent -1,-1.25 1,1.25, height 3.81
SOP8_EP_127P4X5X1_5 [mm]
  oval 1.5x0.6 smd: 1(-3,1.905) 2(-3,0.635) 3(-3,-0.635) 4(-3,-1.905) 5(3,-1.905) 6(3,-0.635) 7(3,0.635) 8(3,1.905)
  rect 2.4x3.1 smd: 9(0,0)
  silkscreen extent -2,-2.5 2,2.5, body extent -3.95,-2.7 3.95,2.7, height 3.81
TF_K [mm]
  rect 2.2x1.2 smd: 0(10.1,-10) 11(10.1,5.5)
  rect 1.6x0.7 smd: 1(0,0) 2(0,-1.1) 3(0,-2.2) 4(0,-3.3) 5(0,-4.4) 6(0,-5.5) 7(0,-6.6) 8(0,-7.7) 9(0,-8.8)
  rect 1.4x1.2 smd: 10(0.5,-10)
  rect 1.4x1.6 smd: 12(0.5,4.6)
  silkscreen extent 0.7,-9.54 14.52,4.9

## Part data
AC1 AC2 AC3 AC4 C1 C2 C3 EC1 EC2 EC3 EC4 EC5 EC6 EC7 EC8 EC9 FC1 FC2 FC3 FC4 FC5 FC6 FC7 FC8 FC9: library part CAPACITOR, "Generic Capacitor"
C4: library part CAPACITOR_1, "Generic Capacitor"
C5 C6 C7 C8: library part 150u, Contributor=LCEDA_Lib, nameAlias=Value(F), spicePre=C, spiceSymbolName=C_Tan_SMD_A_US
C9 C10: library part 1u, Contributor=LCEDA_Lib, nameAlias=Value(F), spicePre=C, spiceSymbolName=C_0603_US
EL1 FL1: library part Inductor, "Generic Inductor"
ER1 ER2 FR1 FR2 R1 R2 R3: library part RESISTOR, "Generic Resistor"
EU1 EU2: library part TPS54327
F1: library part "Fuse 2", "Fuse", LatestRevisionDate=17-Jul-2002, LatestRevisionNote="Re-released for DXP Platform.", PackageReference=PIN-W2/E2.8, Published=8-Jun-2000, Publisher="Altium Limited"
FEP1: library part FEP-2X
H1: "Header, 3-Pin", LatestRevisionDate=17-Jul-2002, LatestRevisionNote="Re-released for DXP Platform.", Publisher="Altium Limited"
HT1 HT2: library part FX8-120P-SV92
HT3: library part FX8-100P-SV92
J1: library part SD
J4: "Receptacle Assembly, 9 Position, Right Angle", PackageDocument=O, DatasheetDocument=1-Sep-1999, Gender=Receptacle, LatestRevisionDate=17-Jul-2002, LatestRevisionNote="Re-released for DXP Platform.", Orientation="Right Angle", PackageReference=788750, Positions=9, Published=15-Jun-2001, Publisher="Altium Limited"
JTAG: library part HEADER2X5
U2: "No Description Available", Built_By=EMA_UL_Team, Copyright="Copyright (C) 2018 Accelerated Designs. All rights reserved", Manufacturer_Part_Number=MAX3490CSA+, RefDes=RefDes, Revision=3, SourceLibrary=Maxim_2011-10-27, Type=DEV, Vendor="Maxim Integrated Products"
U3: "No Description Available", Manufacturer_Part_Number=lt1764eq-2.5#trpbf, Copyright="Copyright (C) 2018 Accelerated Designs. All rights reserved", RefDes=RefDes, Type=DEV, Vendor="Linear Technology"
U4: "No Description Available", Manufacturer_Part_Number=lt1764eq-1.8#trpbf, Copyright="Copyright (C) 2018 Accelerated Designs. All rights reserved", RefDes=RefDes, Type=DEV, Vendor="Linear Technology"

## Free pads (board coordinates)
  round 179.92 hole 122.05: 19(196.85,3740.16) 20(196.85,196.85) 21(4133.86,3740.16) 22(4133.86,196.85) C1(1539.84,2884.41) C2(3700.87,2884.41) C3(1539.84,329.69) C4(3700.87,329.69)

## Via types
v1: diameter 16, hole 8, Top to Bottom, 219 vias
v2: diameter 30, hole 15, Top to Bottom, 75 vias
v3: diameter 22, hole 12, Top to Bottom, 48 vias
v4: diameter 28, hole 14, Top to Bottom, 3 vias
v5: diameter 39.37, hole 39.37, Top to Bottom, 2 vias
v6: diameter 24, hole 12, Top to Bottom, 2 vias
v7: diameter 40, hole 20, Top to Bottom, 1 vias

## Nets (pads, with @x,y where several pads share a name; then routed paths per layer and width w, separated by ;. In a path a pad name is that pad's centre, name@x,y a point inside that pad or via, vN(x,y) a via of type N, cw(c..) or ccw(c..) an arc to the next point about the centre after c; other vN are vias at no path point)
5V_IN: AC1.2 AC2.2 EC6.2 EC7.2 EC8.2 EC9.2 EL1.2 ER1.1 FEP1.A1 FEP1.B1 FEP1.C1 FEP1.D1 HT1.A1 HT1.A2 HT1.B1 HT1.B2 HT2.A1 HT2.A2 HT2.B1 HT2.B2 HT3.A1 HT3.A2 HT3.B1 HT3.B2 | length 14359.3
  Top w20: v2(117.28,2250.2) 117.28,2277.68 135,2295.41 135,2590 ; v2(195,2760) 135,2700 135,2645 ; v2(250,2760) 135,2645 ; v2(305,2760) 135,2590 ; v2(514.73,2230.88) 775.23,2230.88 FEP1.A1@778.55,2234.2 ; 135,2590 135,2645
  Top w25: v2(369.66,2290.34) 415,2335.69 415,2600 500,2685 1629.38,2685 1729.38,2785 2940.43,2785 3008.9,2716.54 AC2.2@3020.71,2716.54
  Top w60: 3336.09,2679.62 3355.71,2660 3423.93,2660 3435.04,2648.89 3435.04,1114.14 3458.48,1090.71 v2@3621.72,1090.71
  PWR w30: v2(514.73,2230.88) 514.73,2259.52
  PWR w40: 232.5,2592.5 117.28,2477.28 v2(117.28,2250.2) 304.8,2250.2 v2(305,2250) 329.31,2250 v2(369.66,2290.34) ; v2(1585.71,1090) 1587.53,1091.82 v2@1807.28,1091.82
  PWR w50: v2@1807.28,1091.82 1973.51,1091.82
  PWR w60: 232.5,2592.5 290,2650 745,2650 ; 514.73,2259.52 764.21,2509 ; 745,2495.94 745,2650 ; 1973.51,1091.82 2216.88,1335.2 v2(3433.37,1335.2) 3433.37,767.33 3185.71,519.67 v2(3185.71,445) 3245.71,385 v2(3245.71,230) ; v2(3250.71,2715) 3247.85,2712.14 v2(3184.02,2712.14) 2747.86,2712.14 2715,2745 1900,2745 1805,2650 745,2650
  Bottom w15: HT1.A1@1510.71,1086.38 HT1.A2@1510.71,1110 ; HT1.B1@1735.12,1086.38 HT1.B2@1735.12,1110 ; HT2.A1@3505.2,1086.38 HT2.A2@3505.2,1110
  Bottom w20: HT1.A1@1510.71,1086.22 1579.22,1086.22 1583,1090 v2(1585.71,1090) ; HT1.B1@1735.12,1086.38 1738.23,1089.49 1768.84,1089.49 1770.79,1091.44 1805.08,1091.44 v2(1805.37,1091.73) ; HT3.A2@3173.7,294.25 3173.7,241.72 3185.42,230 v2(3245.71,230) 3245.71,232.71 3243.27,235.15 3243.27,278.28 3231.55,290 HT3.A1@3200.43,290 ; v2(3185.71,445) 3185.71,447.71 3173.7,459.71 HT3.B2@3173.7,518.66 HT3.B1@3197.32,518.66 ; HT2.A1@3505.2,1086.38 3507.11,1088.29 3727.69,1088.29 3728.88,1089.49 3728.88,1109.28 HT2.B2@3729.61,1110
  other v2: 3621.72,1090.21 3185,2650 3255.71,2650 3316.01,2650 3316.01,2716.41
B12_L1_N: FEP1.A16 HT1.B18 | length 2433.4
  Top w5: FEP1.A16@784.41,1755.91 823.78,1755.91 829.15,1761.28 829.15,1764.22 832.08,1767.15 873.93,1767.15 909.5,1802.72 912,1805.22 913.86,1805.22 918.11,1809.47 918.11,1840.51 cw(c923.11,1840.51) 923.11,1845.51 930.16,1845.51 ccw(c930.16,1862.14) 946.79,1862.14 ccw(c930.16,1862.14) 930.16,1878.77 923.11,1878.77 cw(c923.11,1883.77) 918.11,1883.77 918.11,1902.4 963.73,1948.02 978.22,1948.02 ccw(c978.22,1962.02) 992.22,1962.02 992.22,2007.47 cw(c997.22,2007.47) 1002.22,2007.47 1002.22,1903.63 ccw(c1016.22,1903.63) 1030.22,1903.63 1030.22,2007.47 cw(c1035.22,2007.47) 1040.22,2007.47 1040.22,1903.63 ccw(c1054.22,1903.63) 1068.22,1903.63 1068.22,2007.47 cw(c1073.22,2007.47) 1078.22,2007.47 1078.22,1962.02 ccw(c1092.22,1962.02) 1092.22,1948.02 1095.85,1948.02 1102.04,1941.83 1102.04,1940.51 1120.71,1921.85 1120.71,1815.42 1212.08,1724.05 1217,1719.13 ccw(c1226.93,1729) 1236.85,1719.13 ; 1236.85,1719.13 1239.58,1721.86 ; 1239.6,1721.88 cw(c1243.14,1718.35) 1246.65,1721.9 ; 1246.69,1721.86 cw(c1243.14,1718.35) 1246.67,1714.81 1237.2,1705.34 ccw(c1247.08,1695.42) 1237.18,1685.52 ccw(c1247.08,1695.42) 1256.99,1685.53 1263.67,1692.21 ; 1263.7,1692.23 cw(c1267.23,1688.7) 1270.75,1692.25 ; 1270.74,1685.14 ccw(c1280.67,1675.26) 1270.8,1665.33 1307.61,1628.52 1361.24,1574.89 1402.24,1574.89 ccw(c1402.24,1588.89) 1416.24,1588.89 1416.24,1608.38 cw(c1421.24,1608.38) 1426.24,1608.38 1426.24,1521.37 ccw(c1440.24,1521.37) 1454.24,1521.37 1454.24,1608.38 cw(c1459.24,1608.38) 1464.24,1608.38 1464.24,1521.37 ccw(c1478.24,1521.37) 1492.24,1521.37 1492.24,1569.89 cw(c1497.24,1569.89) 1497.24,1574.89 1533.33,1574.89 1552.07,1593.64 1561.01,1593.64 1572.86,1581.79 1584.29,1581.79 1641.79,1524.29 1644.75,1521.36 1644.75,1505.81 1654.41,1496.15 1662.28,1496.15 1670.28,1488.15 v1(1670.71,1488.15) ; 1270.78,1685.18 ccw(c1267.23,1688.7) 1270.79,1692.22
  Bottom w5: v1(1670.71,1488.15) 1673.17,1488.15 1679.14,1494.11 1702.38,1494.11 1708.54,1487.95 HT1.B18@1735.12,1487.95
B12_L1_P: FEP1.A15 HT1.B19 | length 2436.4
  Top w5: FEP1.A15@784.41,1787.4 823.78,1787.4 829.15,1782.03 829.15,1779.08 832.08,1776.15 870.2,1776.15 905.64,1811.59 905.64,1813.45 906.48,1814.29 906.48,1840.51 cw(c923.11,1840.51) 923.11,1857.14 930.16,1857.14 ccw(c930.16,1862.14) 935.16,1862.14 ccw(c930.16,1862.14) 930.16,1867.14 923.11,1867.14 cw(c923.11,1883.77) 906.48,1883.77 906.48,1892.08 906.48,1903.5 960,1957.02 978.22,1957.02 ccw(c978.22,1962.02) 983.22,1962.02 983.22,2007.47 cw(c997.22,2007.47) 1011.22,2007.47 1011.22,1903.63 ccw(c1016.22,1903.63) 1021.22,1903.63 1021.22,2007.47 cw(c1035.22,2007.47) 1049.22,2007.47 1049.22,1903.63 ccw(c1054.22,1903.63) 1059.22,1903.63 1059.22,2007.47 cw(c1073.22,2007.47) 1087.22,2007.47 1087.22,1962.02 ccw(c1092.22,1962.02) 1092.22,1957.02 1099.58,1957.02 1108.41,1948.2 1109.73,1948.2 1114.48,1943.45 1129.71,1928.22 1129.71,1819.15 1218.44,1730.42 1223.37,1725.49 ccw(c1226.93,1729) 1230.48,1725.48 ; 1230.49,1725.49 1233.21,1728.22 ; 1233.22,1728.23 cw(c1243.14,1718.35) 1253.04,1728.25 cw(c1243.14,1718.35) 1253.02,1708.43 ; 1243.55,1691.87 ccw(c1247.08,1695.42) 1250.61,1691.88 ; 1243.53,1691.89 cw(c1247.08,1695.42) 1243.54,1698.95 1253.01,1708.42 ; 1250.64,1691.91 1257.31,1698.57 ; 1257.32,1698.58 cw(c1267.23,1688.7) 1277.13,1698.6 cw(c1267.23,1688.7) 1277.11,1678.78 ccw(c1280.67,1675.26) 1277.14,1671.71 1313.97,1634.88 1364.97,1583.89 1402.24,1583.89 ccw(c1402.24,1588.89) 1407.24,1588.89 1407.24,1608.38 cw(c1421.24,1608.38) 1435.24,1608.38 1435.24,1521.37 ccw(c1440.24,1521.37) 1445.24,1521.37 1445.24,1608.38 cw(c1459.24,1608.38) 1473.24,1608.38 1473.24,1521.37 ccw(c1478.24,1521.37) 1483.24,1521.37 1483.24,1569.89 cw(c1497.24,1569.89) 1497.24,1583.89 1529.6,1583.89 1546.1,1600.39 1548.34,1602.64 1564.74,1602.64 1576.59,1590.79 1588.16,1590.79 1646.65,1532.29 1646.65,1532.22 ; 1645.55,1533.32 1646.65,1532.22 ; v1(1670.71,1513.15) 1670.28,1513.15 1662.28,1505.15 1658.14,1505.15 1653.75,1509.54 1653.75,1525.12 1646.65,1532.22
  Bottom w5: v1(1670.71,1513.15) 1671.14,1513.15 1679.14,1505.15 1696.2,1505.15 1697.08,1504.26 1701.23,1504.26 1708.54,1511.57 HT1.B19@1735.12,1511.57
B12_L2_N: FEP1.A11 HT1.A23 | length 2434.5
  Top w5: FEP1.A11@784.41,1913.39 823.78,1913.39 829.15,1918.76 829.15,1921.7 832.08,1924.63 840.3,1924.63 841.09,1923.85 870.21,1923.85 v1(880.71,1913.35)
  Bottom w5: v1(880.71,1913.35) 880.71,1913.7 889.14,1922.13 946.84,1922.13 953.84,1922.13 ccw(c953.84,1936.13) 967.84,1936.13 967.84,1957.13 cw(c972.84,1957.13) 977.84,1957.13 977.84,1876.79 ccw(c991.84,1876.79) 1005.84,1876.79 1005.84,1957.13 cw(c1010.84,1957.13) 1015.84,1957.13 1015.84,1876.79 ccw(c1029.84,1876.79) 1043.84,1876.79 1043.84,1957.13 cw(c1048.84,1957.13) 1053.84,1957.13 1053.84,1876.79 ccw(c1067.84,1876.79) 1081.84,1876.79 1081.84,1957.13 cw(c1086.84,1957.13) 1091.84,1957.13 1091.84,1876.79 ccw(c1105.84,1876.79) 1119.84,1876.79 1119.84,1957.13 cw(c1124.84,1957.13) 1129.84,1957.13 1129.84,1887.85 ccw(c1143.84,1887.85) 1157.84,1887.85 1157.84,1917.13 cw(c1162.84,1917.13) 1162.84,1922.13 1195.7,1922.13 1233.27,1922.13 1243.42,1911.98 1248.34,1907.06 ccw(c1258.27,1916.93) 1268.2,1907.06 1296.81,1935.67 ; 1296.83,1935.69 cw(c1300.37,1932.16) 1303.88,1935.71 ; 1303.88,1928.6 1224.25,1848.97 ccw(c1234.13,1839.05) 1224.23,1829.15 ccw(c1234.13,1839.05) 1244.04,1829.17 1323.68,1908.8 ; 1303.9,1928.62 ccw(c1300.37,1932.16) 1303.92,1935.67 ; 1323.7,1908.82 cw(c1327.24,1905.29) 1330.75,1908.84 ; 1330.75,1901.73 1251.12,1822.1 ccw(c1261,1812.18) 1251.1,1802.28 ccw(c1261,1812.18) 1270.91,1802.3 1350.18,1881.56 ; 1330.77,1901.75 ccw(c1327.24,1905.29) 1330.79,1908.8 ; 1350.21,1881.59 cw(c1353.74,1878.06) 1357.26,1881.61 ; 1357.3,1881.57 cw(c1353.74,1878.05) 1357.28,1874.52 1329.01,1846.25 ccw(c1338.88,1836.32) 1329.01,1826.39 1343.34,1812.07 1350.49,1804.92 1350.49,1659.86 1396.98,1613.37 1476.82,1613.37 1484.13,1606.06 HT1.A23@1510.71,1606.06
B12_L2_P: FEP1.A10 HT1.A24 | length 2433.1
  Top w5: FEP1.A10@784.41,1944.88 823.78,1944.88 829.15,1939.51 829.15,1936.56 832.08,1933.63 844.03,1933.63 844.82,1932.85 870.21,1932.85 877.28,1939.92 v1(881.51,1939.92)
  Bottom w5: v1(881.51,1939.92) 881.51,1939.56 889.94,1931.13 946.84,1931.13 953.84,1931.13 ccw(c953.84,1936.13) 958.84,1936.13 958.84,1957.13 cw(c972.84,1957.13) 986.84,1957.13 986.84,1876.79 ccw(c991.84,1876.79) 996.84,1876.79 996.84,1957.13 cw(c1010.84,1957.13) 1024.84,1957.13 1024.84,1876.79 ccw(c1029.84,1876.79) 1034.84,1876.79 1034.84,1957.13 cw(c1048.84,1957.13) 1062.84,1957.13 1062.84,1876.79 ccw(c1067.84,1876.79) 1072.84,1876.79 1072.84,1957.13 cw(c1086.84,1957.13) 1100.84,1957.13 1100.84,1876.79 ccw(c1105.84,1876.79) 1110.84,1876.79 1110.84,1957.13 cw(c1124.84,1957.13) 1138.84,1957.13 1138.84,1887.85 ccw(c1143.84,1887.85) 1148.84,1887.85 1148.84,1917.13 cw(c1162.84,1917.13) 1162.84,1931.13 1195.7,1931.13 1237,1931.13 1249.79,1918.35 1254.72,1913.42 ccw(c1258.27,1916.93) 1261.83,1913.41 ; 1230.58,1835.52 cw(c1234.13,1839.05) 1230.59,1842.58 1310.24,1922.23 ccw(c1300.37,1932.16) 1310.27,1942.06 ccw(c1300.37,1932.16) 1290.45,1942.04 1261.83,1913.42 ; 1230.6,1835.5 ccw(c1234.13,1839.05) 1237.66,1835.51 ; 1237.69,1835.54 1317.31,1915.16 cw(c1327.24,1905.29) 1337.14,1915.19 cw(c1327.24,1905.29) 1337.12,1895.37 1257.49,1815.74 ; 1257.46,1815.71 ccw(c1261,1812.18) 1257.45,1808.65 ccw(c1261,1812.18) 1264.53,1808.64 ; 1264.56,1808.67 1343.82,1887.93 ; 1335.36,1839.88 ccw(c1338.88,1836.32) 1335.36,1832.77 1349.7,1818.43 1359.49,1808.65 1359.49,1663.59 1400.71,1622.37 1476.82,1622.37 1484.13,1629.68 HT1.A24@1510.71,1629.68 ; 1335.37,1839.88 1363.62,1868.13 ccw(c1353.74,1878.05) 1363.64,1887.95 ccw(c1353.74,1878.06) 1343.83,1887.94
B12_L3_N: FEP1.A25 HT1.B9 | length 2433
  Top w5: FEP1.A25@784.41,1472.44 823.78,1472.44 833.52,1482.18 847.48,1482.18 942.48,1387.18 942.48,1060.5 976.98,1026 1080.82,1026 1087.82,1026 ccw(c1087.82,1040) 1101.82,1040 1101.82,1108.58 cw(c1106.82,1108.58) 1111.82,1108.58 1111.82,1019.99 ccw(c1125.82,1019.99) 1139.82,1019.99 1139.82,1108.58 cw(c1144.82,1108.58) 1149.82,1108.58 1149.82,1019.99 ccw(c1163.82,1019.99) 1177.82,1019.99 1177.82,1108.58 cw(c1182.82,1108.58) 1187.82,1108.58 1187.82,1019.99 ccw(c1201.82,1019.99) 1215.82,1019.99 1215.82,1108.58 cw(c1220.82,1108.58) 1225.82,1108.58 1225.82,1019.99 ccw(c1239.82,1019.99) 1253.82,1019.99 1253.82,1088.33 cw(c1258.82,1088.33) 1263.82,1088.33 1263.82,1040 ccw(c1277.82,1040) 1277.82,1026 1296.99,1026 1297.51,1026 1305.71,1034.2 1305.71,1150 1386.22,1230.51 1494.48,1230.51 1545.73,1281.77 1661.66,1281.77 1670.28,1273.15 v1(1670.71,1273.15)
  Bottom w5: v1(1670.71,1273.15) 1671.14,1273.15 1680.49,1282.5 1701.39,1282.5 1708.54,1275.35 HT1.B9@1735.12,1275.35
B12_L3_P: FEP1.A24 HT1.B10 | length 2434.7
  Top w5: FEP1.A24@784.41,1503.94 823.78,1503.94 829.15,1498.56 829.15,1495.62 832.08,1492.69 851.82,1492.69 877.31,1467.2 877.6,1467.2 952.26,1392.54 952.26,1063.45 980.71,1035 1080.82,1035 1087.82,1035 ccw(c1087.82,1040) 1092.82,1040 1092.82,1108.58 cw(c1106.82,1108.58) 1120.82,1108.58 1120.82,1019.99 ccw(c1125.82,1019.99) 1130.82,1019.99 1130.82,1108.58 cw(c1144.82,1108.58) 1158.82,1108.58 1158.82,1019.99 ccw(c1163.82,1019.99) 1168.82,1019.99 1168.82,1108.58 cw(c1182.82,1108.58) 1196.82,1108.58 1196.82,1019.99 ccw(c1201.82,1019.99) 1206.82,1019.99 1206.82,1108.58 cw(c1220.82,1108.58) 1234.82,1108.58 1234.82,1019.99 ccw(c1239.82,1019.99) 1244.82,1019.99 1244.82,1088.33 cw(c1258.82,1088.33) 1272.82,1088.33 1272.82,1040 ccw(c1277.82,1040) 1277.82,1035 1293.78,1035 1296.71,1037.93 1296.71,1125.08 1296.71,1153.73 1382.49,1239.51 1489.34,1239.51 1540.87,1291.04 1662.28,1291.04 1669.39,1298.15 v1(1670.71,1298.15)
  Bottom w5: v1(1670.71,1298.15) 1673.69,1298.15 1678.88,1292.95 1702.52,1292.95 1708.54,1298.98 HT1.B10@1735.12,1298.98
B12_L4_N: FEP1.B25 HT1.B11 | length 2436.1
  Top w5: FEP1.B25@611.18,1472.44 650.55,1472.44 658.89,1480.78 704.43,1480.78 713.32,1471.88 v1(713.32,1471.6)
  SIG1 w5: v1(713.32,1471.6) 714.09,1471.6 721.75,1479.26 784.8,1479.26 807.61,1456.45 812.54,1451.51 831.01,1433.04 cw(c827.5,1429.48) 831.02,1425.93 825.17,1420.08 ccw(c835.05,1410.15) 825.15,1400.25 ccw(c835.05,1410.15) 844.96,1400.27 872.73,1428.04 ; 852.58,1354.15 cw(c842.67,1364.03) 832.77,1354.13 cw(c842.67,1364.03) 832.78,1373.95 879.8,1420.97 ; 852.59,1354.16 899.6,1401.17 ; 872.76,1428.07 cw(c876.29,1424.53) 879.81,1428.09 ; 879.83,1421 ccw(c876.29,1424.53) 879.85,1428.05 ; 899.63,1401.2 cw(c903.16,1397.66) 906.68,1401.22 ; 906.67,1394.1 859.66,1347.09 ccw(c869.54,1337.16) 859.64,1327.26 ccw(c869.54,1337.16) 879.45,1327.28 926.47,1374.3 ; 906.7,1394.13 ccw(c903.16,1397.66) 906.72,1401.18 ; 926.5,1374.33 cw(c930.03,1370.79) 933.55,1374.35 ; 933.59,1374.31 cw(c930.03,1370.79) 933.57,1367.26 886.53,1320.22 ccw(c896.41,1310.29) 886.51,1300.39 ccw(c896.41,1310.29) 906.32,1300.41 953.34,1347.43 cw(c956.9,1343.92) 960.42,1347.48 ; 960.06,1246.67 cw(c950.15,1256.55) 940.25,1246.65 cw(c950.15,1256.55) 940.26,1266.47 987.28,1313.49 ccw(c983.77,1317.05) 987.33,1320.57 ; 960.07,1246.68 985.16,1271.77 cw(c988.72,1268.26) 992.25,1271.8 ; 960.41,1340.36 913.4,1293.35 ccw(c923.28,1283.42) 913.38,1273.52 ccw(c923.28,1283.42) 933.19,1273.54 980.21,1320.56 ; 960.44,1340.39 ccw(c956.9,1343.92) 960.46,1347.44 ; 980.24,1320.59 cw(c983.77,1317.05) 987.29,1320.61 ; 992.28,1271.77 997.21,1266.85 1044.06,1220 1096.71,1220 1103.71,1220 ccw(c1103.71,1234) 1117.71,1234 1117.71,1245.99 cw(c1122.71,1245.99) 1127.71,1245.99 1127.71,1168.27 ccw(c1141.71,1168.27) 1155.71,1168.27 1155.71,1245.99 cw(c1160.71,1245.99) 1165.71,1245.99 1165.71,1180.07 ccw(c1179.71,1180.07) 1193.71,1180.07 1193.71,1215 cw(c1198.71,1215) 1198.71,1220 1254.6,1220 1451.62,1220 1561.37,1329.74 1571.88,1329.74 1579.6,1322.02 v1(1580.31,1322.02)
  Bottom w5: v1(1580.31,1322.02) 1580.31,1322.16 1588.74,1330.59 1652.98,1330.59 1653.65,1329.91 1701.23,1329.91 1708.54,1322.6 HT1.B11@1735.12,1322.6 HT1.B11@1738.85,1322.6
B12_L4_P: FEP1.B24 HT1.B12 | length 2433.7
  Top w5: FEP1.B24@611.18,1503.94 650.55,1503.94 FEP1.B24@655.93,1498.56 ; FEP1.B24@655.93,1498.53 662.1,1492.35 707.07,1492.35 712.75,1498.02 v1(715.73,1498.02)
  SIG1 w5: v1(715.73,1498.02) 715.92,1498.02 724.63,1489.31 787.47,1489.31 813.97,1462.81 818.91,1457.88 ; 818.94,1457.85 837.38,1439.4 cw(c827.5,1429.48) 837.38,1419.56 831.54,1413.71 ; 831.51,1413.69 ccw(c835.05,1410.15) 831.5,1406.63 ccw(c835.05,1410.15) 838.58,1406.62 ; 838.61,1406.64 866.37,1434.4 cw(c876.29,1424.53) 886.19,1434.43 cw(c876.29,1424.53) 886.18,1414.62 839.16,1367.59 ; 839.12,1360.51 cw(c842.67,1364.03) 839.13,1367.57 ; 839.14,1360.49 ccw(c842.67,1364.03) 846.2,1360.5 893.24,1407.53 cw(c903.16,1397.66) 913.06,1407.56 cw(c903.16,1397.66) 913.05,1387.75 866.03,1340.73 ccw(c869.54,1337.16) 865.99,1333.64 ; 866.01,1333.62 ccw(c869.54,1337.16) 873.07,1333.63 ; 873.1,1333.65 920.11,1380.66 cw(c930.03,1370.79) 939.93,1380.69 cw(c930.03,1370.79) 939.92,1360.88 892.9,1313.86 ; 892.87,1313.83 ccw(c896.41,1310.29) 892.86,1306.77 ccw(c896.41,1310.29) 899.94,1306.76 ; 899.97,1306.78 946.98,1353.79 ; 919.73,1279.9 cw(c923.28,1283.42) 919.74,1286.96 ; 919.75,1279.88 ccw(c923.28,1283.42) 926.81,1279.89 ; 919.77,1286.99 966.78,1334 ; 926.84,1279.91 973.85,1326.92 ; 946.61,1260.09 ccw(c950.15,1256.55) 946.6,1253.03 ccw(c950.15,1256.55) 953.68,1253.02 ; 946.64,1260.12 993.65,1307.13 ; 946.99,1353.8 cw(c956.9,1343.92) 966.8,1353.82 cw(c956.9,1343.92) 966.79,1334.01 ; 953.71,1253.04 978.8,1278.13 cw(c988.72,1268.26) 998.65,1278.14 1003.57,1273.21 1047.78,1229 1096.71,1229 1103.71,1229 ccw(c1103.71,1234) 1108.71,1234 1108.71,1245.99 cw(c1122.71,1245.99) 1136.71,1245.99 1136.71,1168.27 ccw(c1141.71,1168.27) 1146.71,1168.27 1146.71,1245.99 cw(c1160.71,1245.99) 1174.71,1245.99 1174.71,1180.07 ccw(c1179.71,1180.07) 1184.71,1180.07 1184.71,1215 cw(c1198.71,1215) 1198.71,1229 1254.6,1229 1447.89,1229 1558.48,1339.59 1570.3,1339.59 1578.86,1348.15 v1(1580.71,1348.15) ; 973.86,1326.93 cw(c983.77,1317.05) 993.67,1326.95 cw(c983.77,1317.05) 993.66,1307.14
  Bottom w5: v1(1580.71,1348.15) 1580.71,1348.02 1589.14,1339.59 1656.7,1339.59 1657.38,1338.91 1701.23,1338.91 1708.54,1346.22 HT1.B12@1735.12,1346.22